# Altium PCB THREE_PHASE_METER.PcbDoc
Units mm, origin at the board's own origin, x right, y up, seen from the top; angles counter-clockwise.
Board outline 97 x 51 mm, 4 copper layers (Top Layer, Layer 2, Layer 3, Bottom Layer), stack 1.841 mm thick; 169 components, 88 nets, 392 pads, 63 vias.
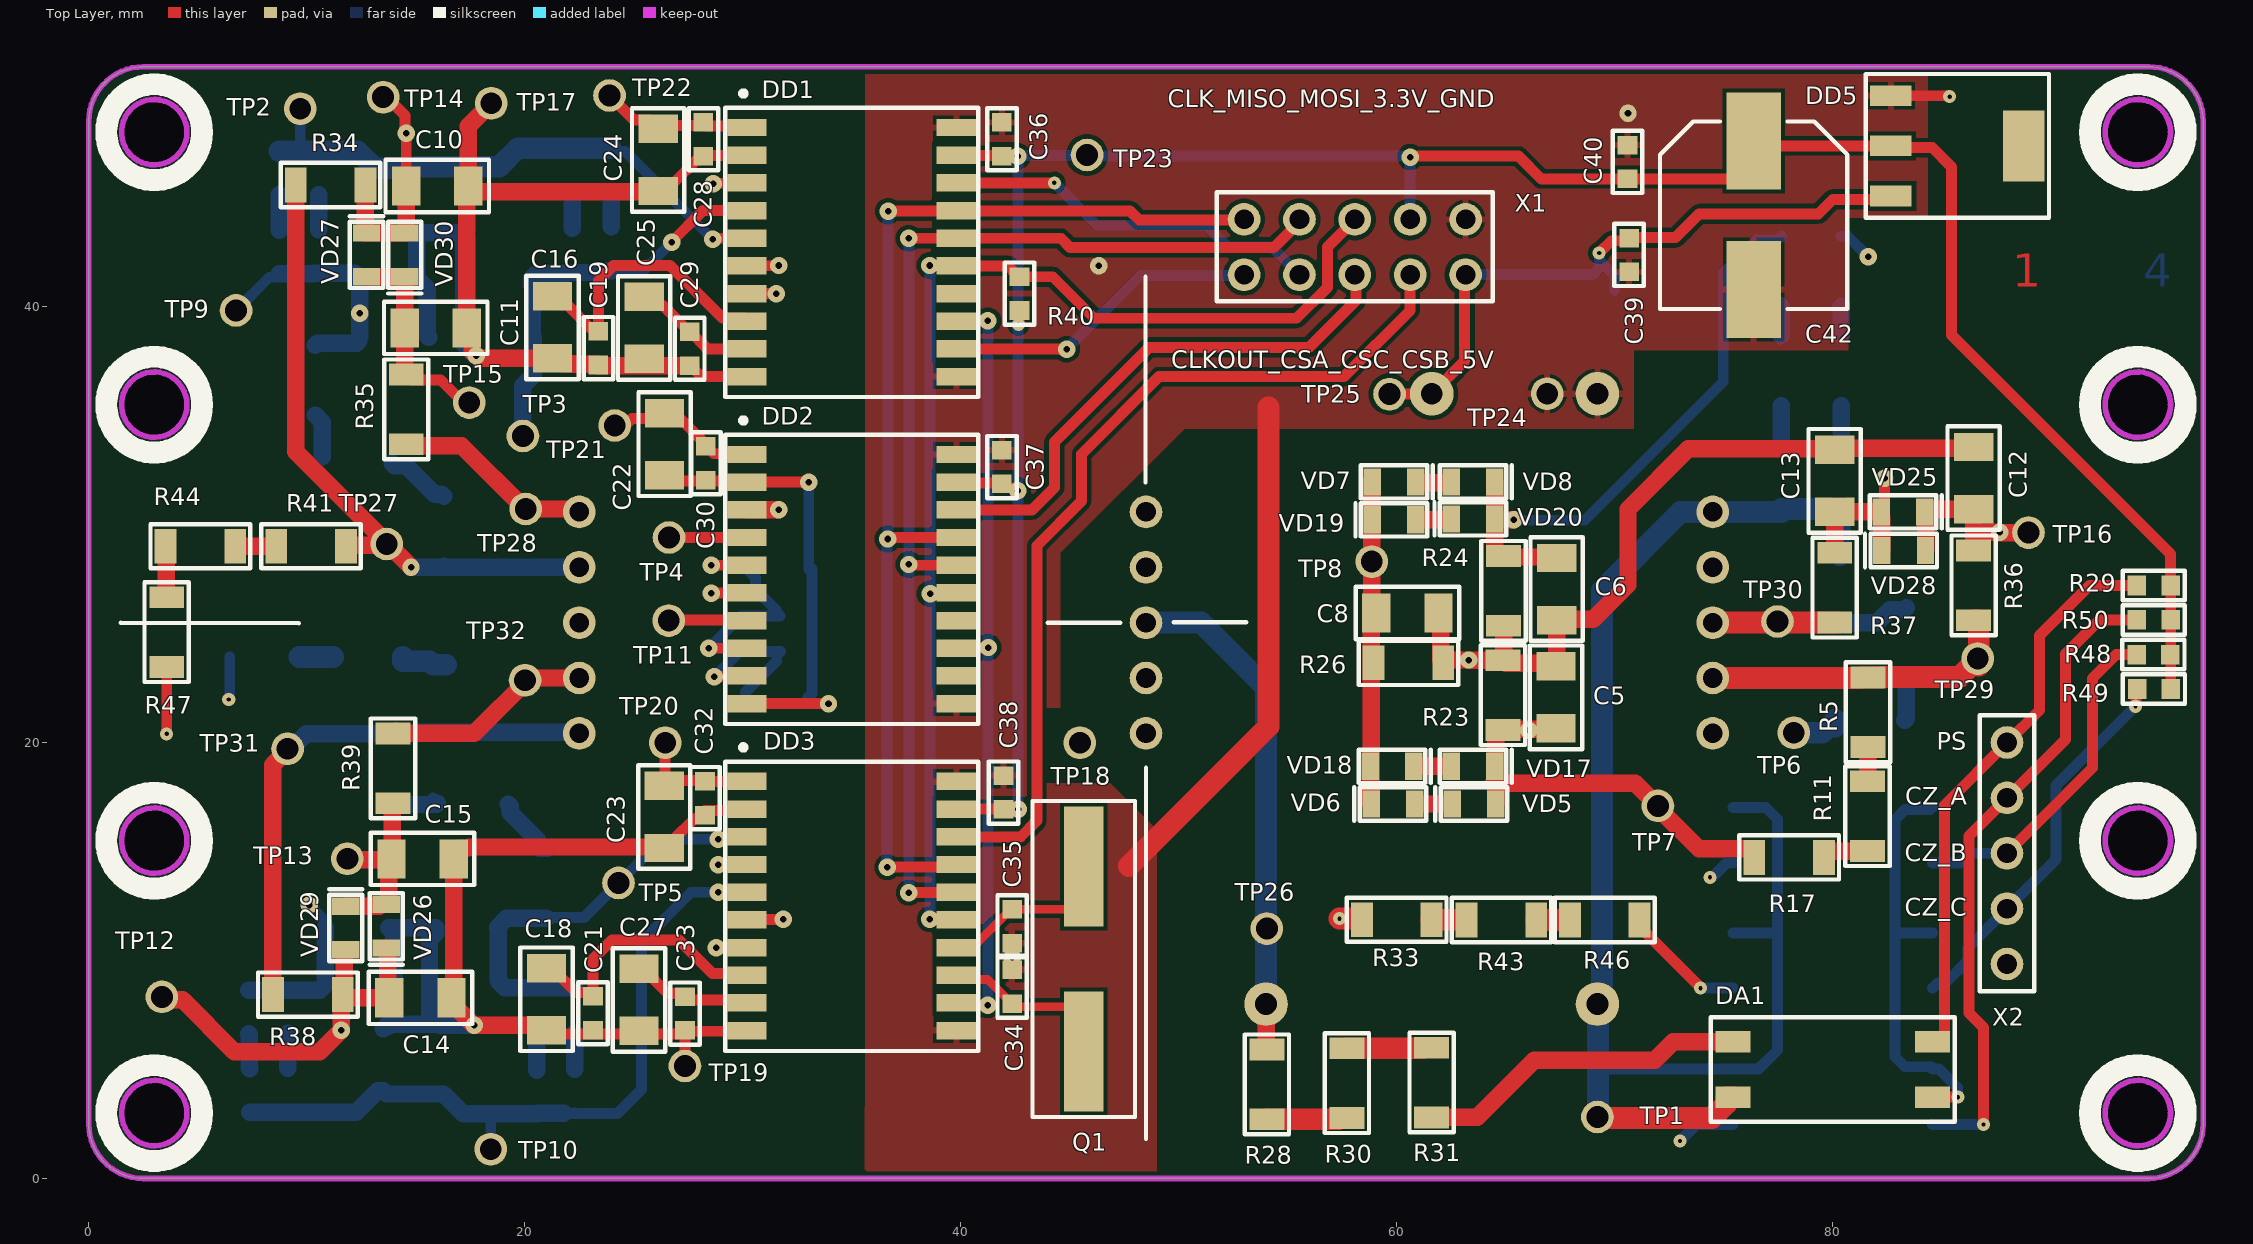
[diagram p0: Top Layer view]
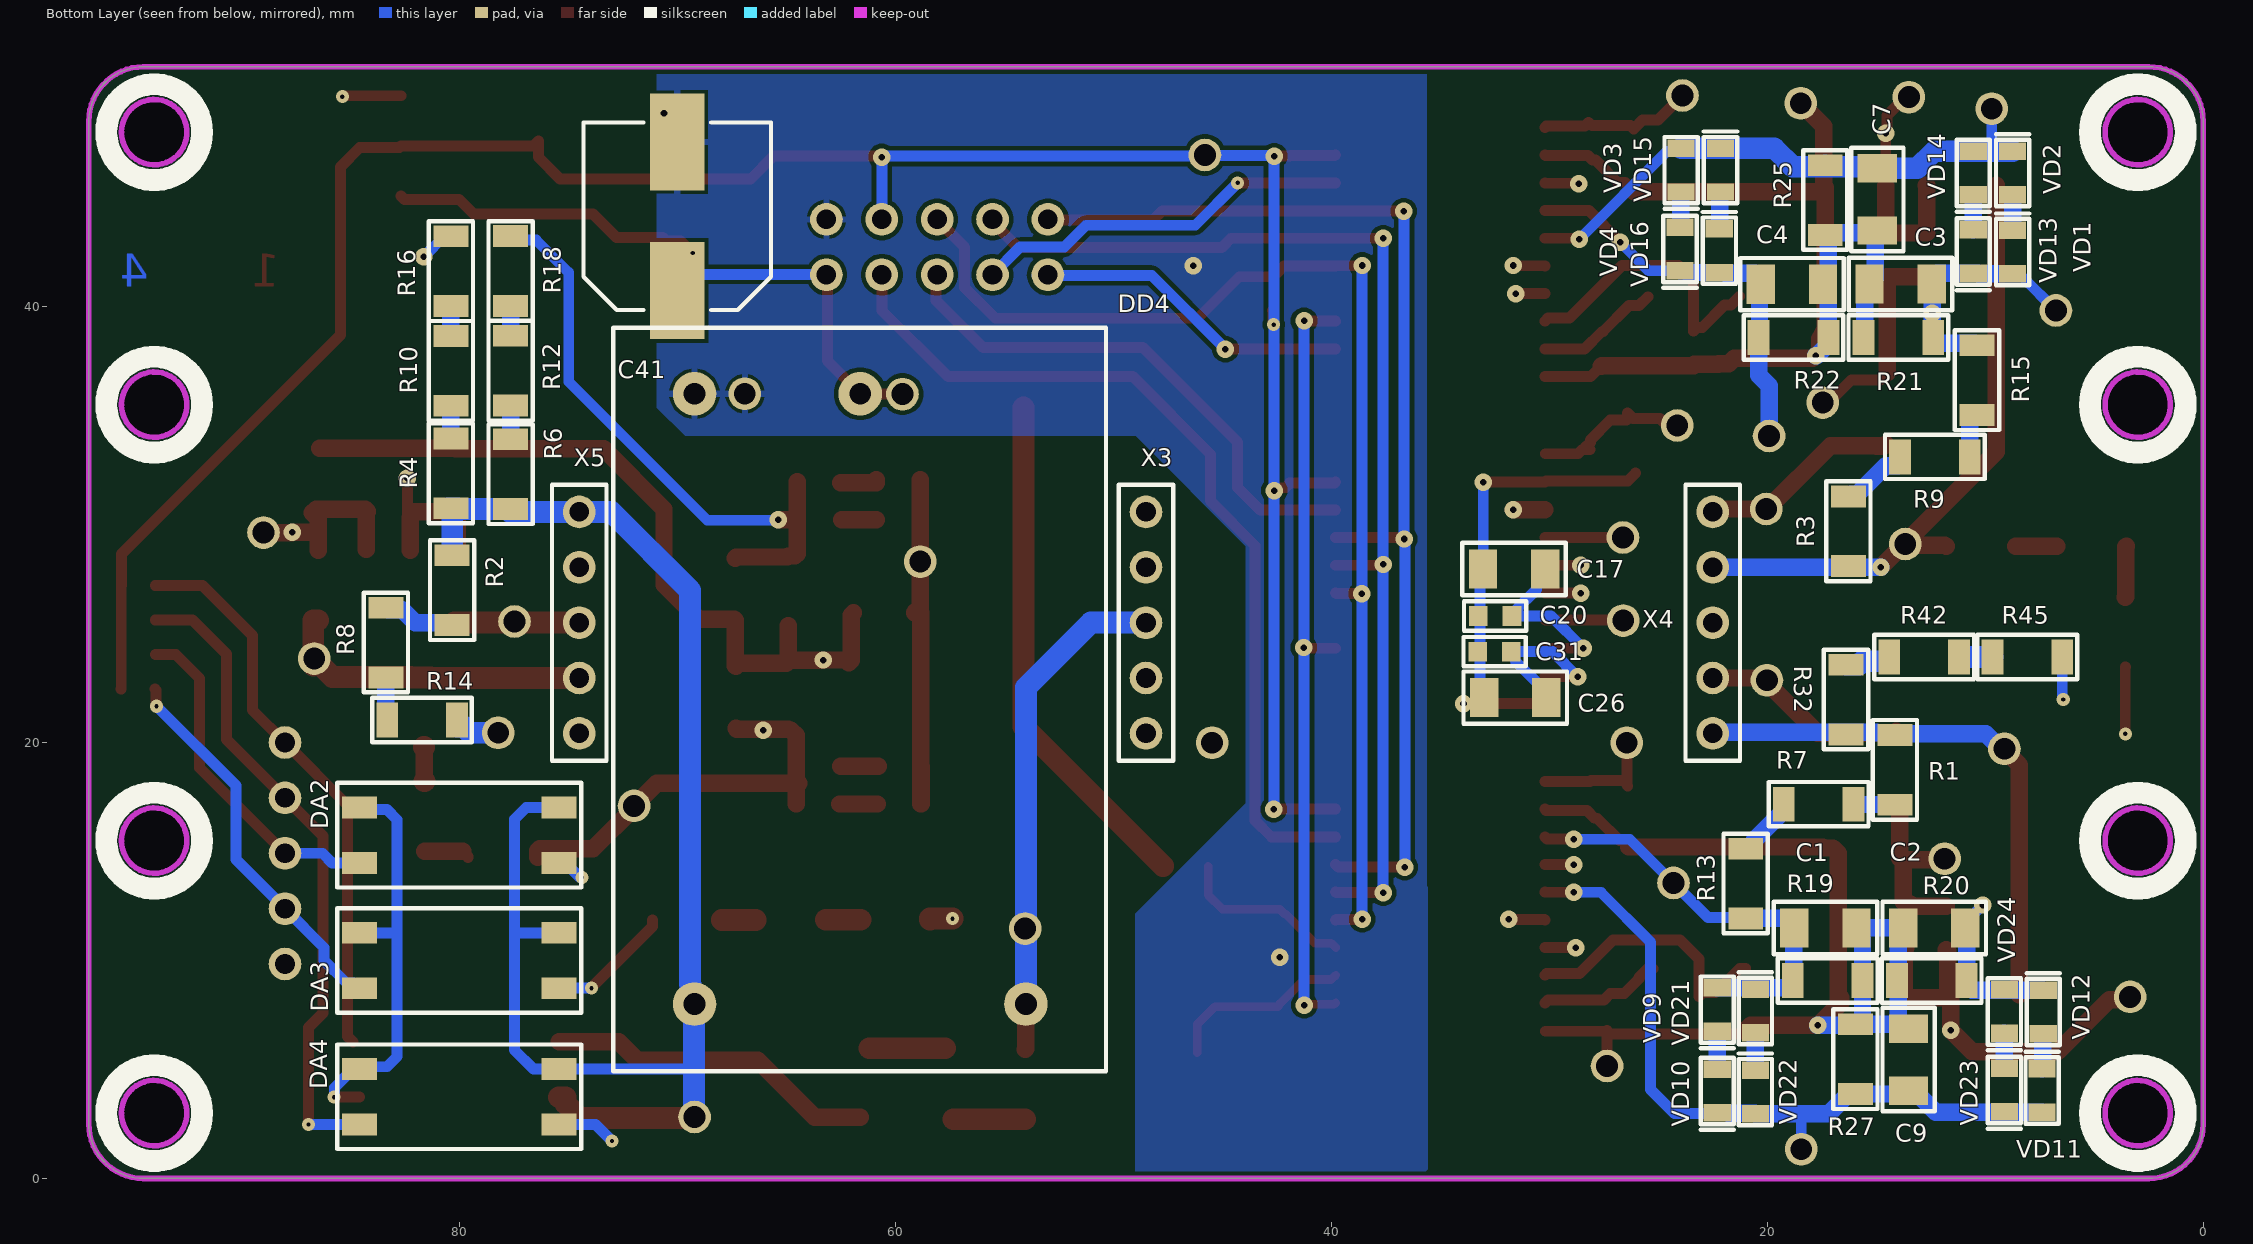
[diagram p1: Bottom Layer view, seen from below]
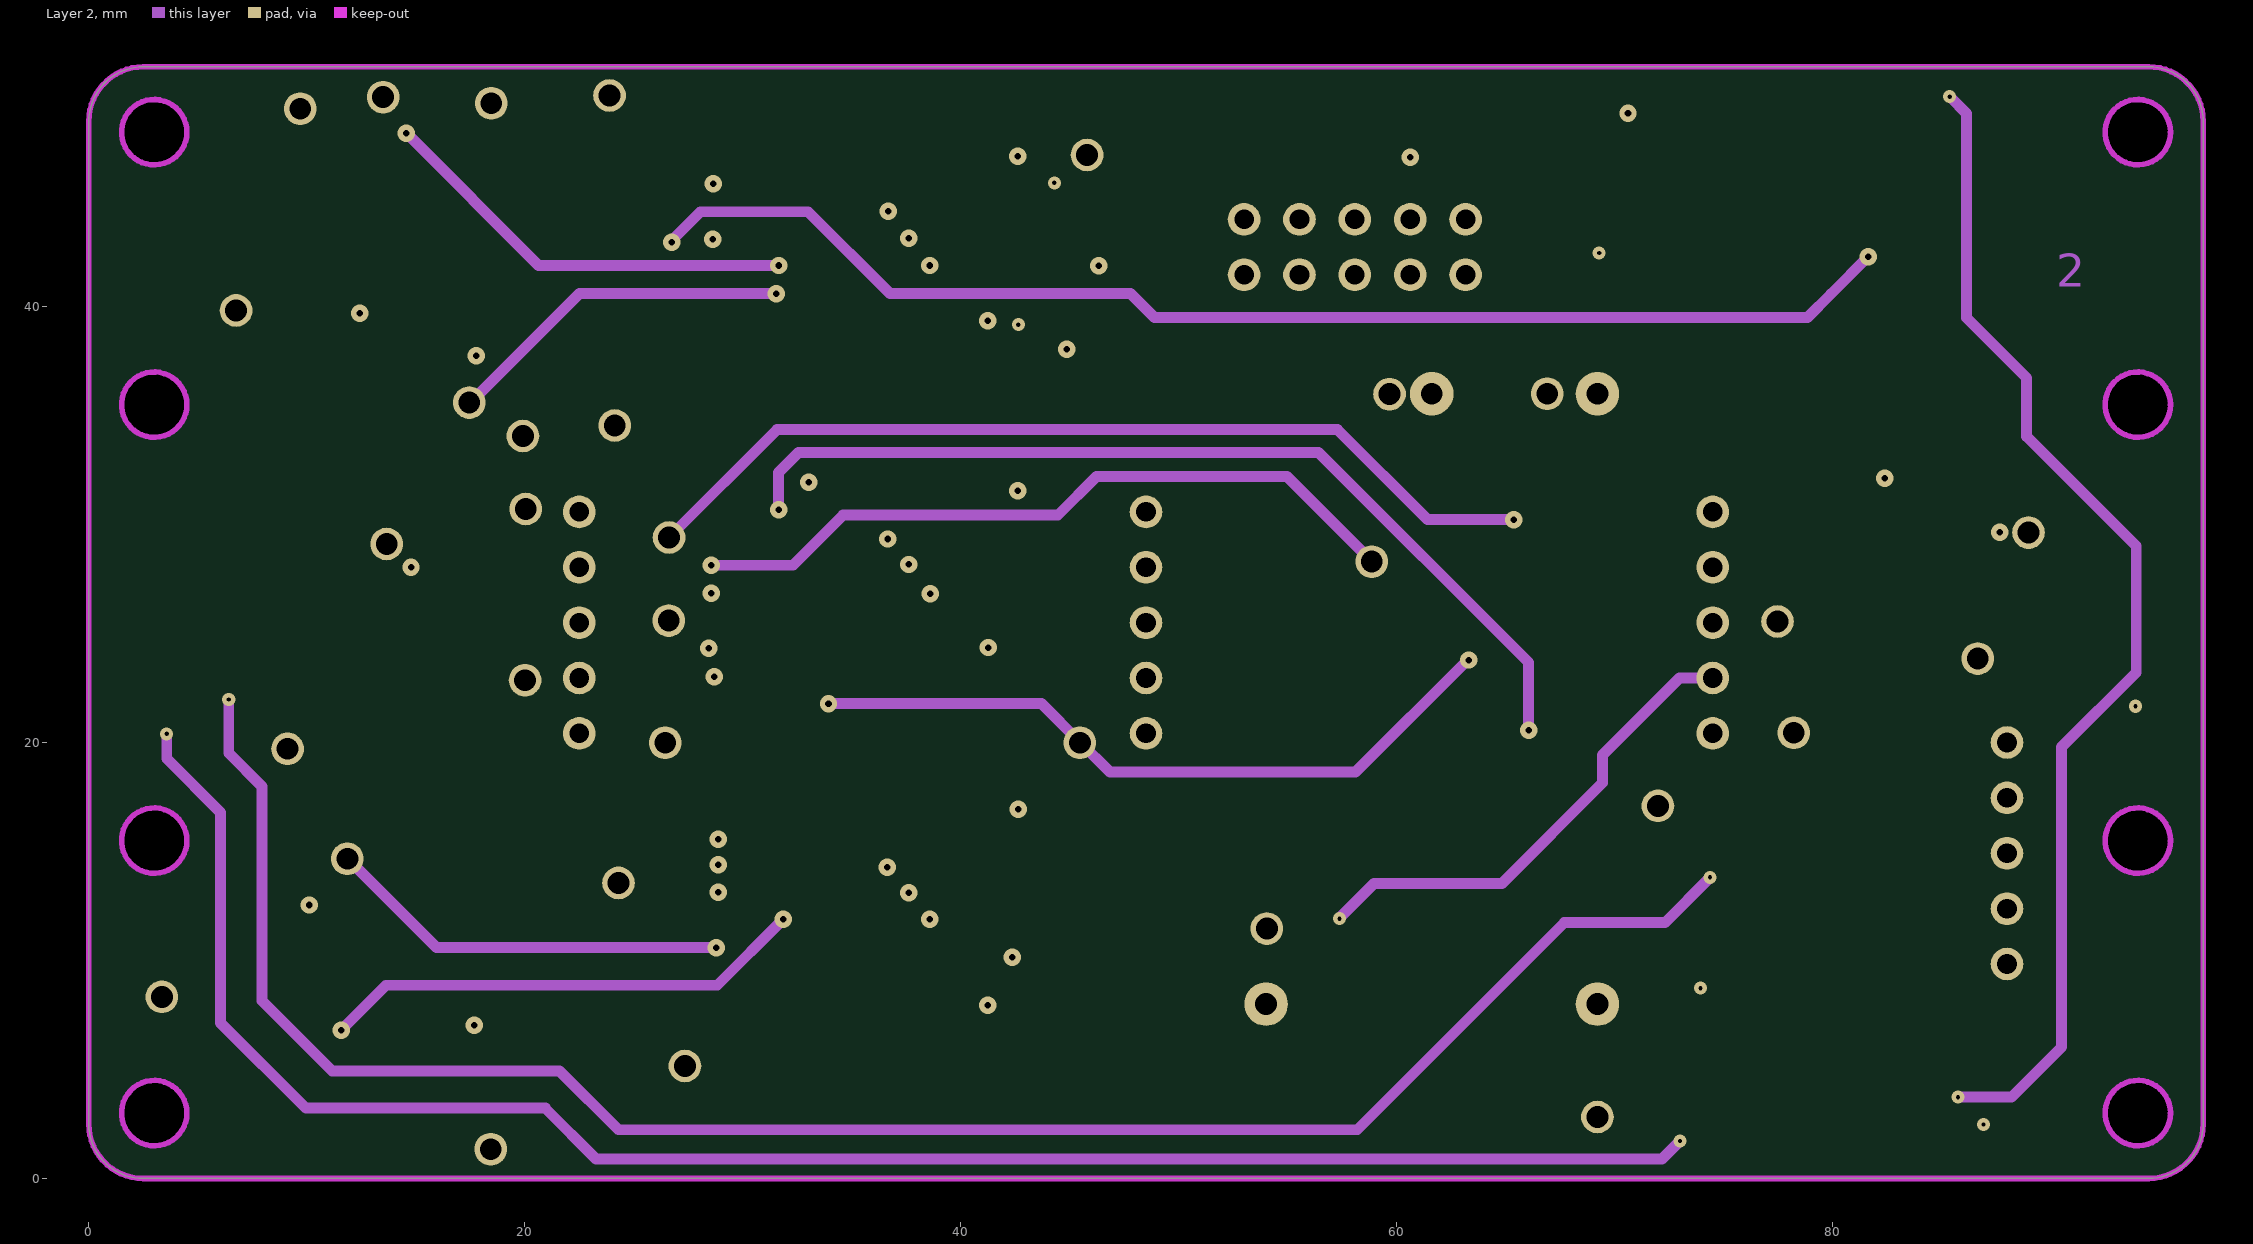
[diagram p2: Layer 2]
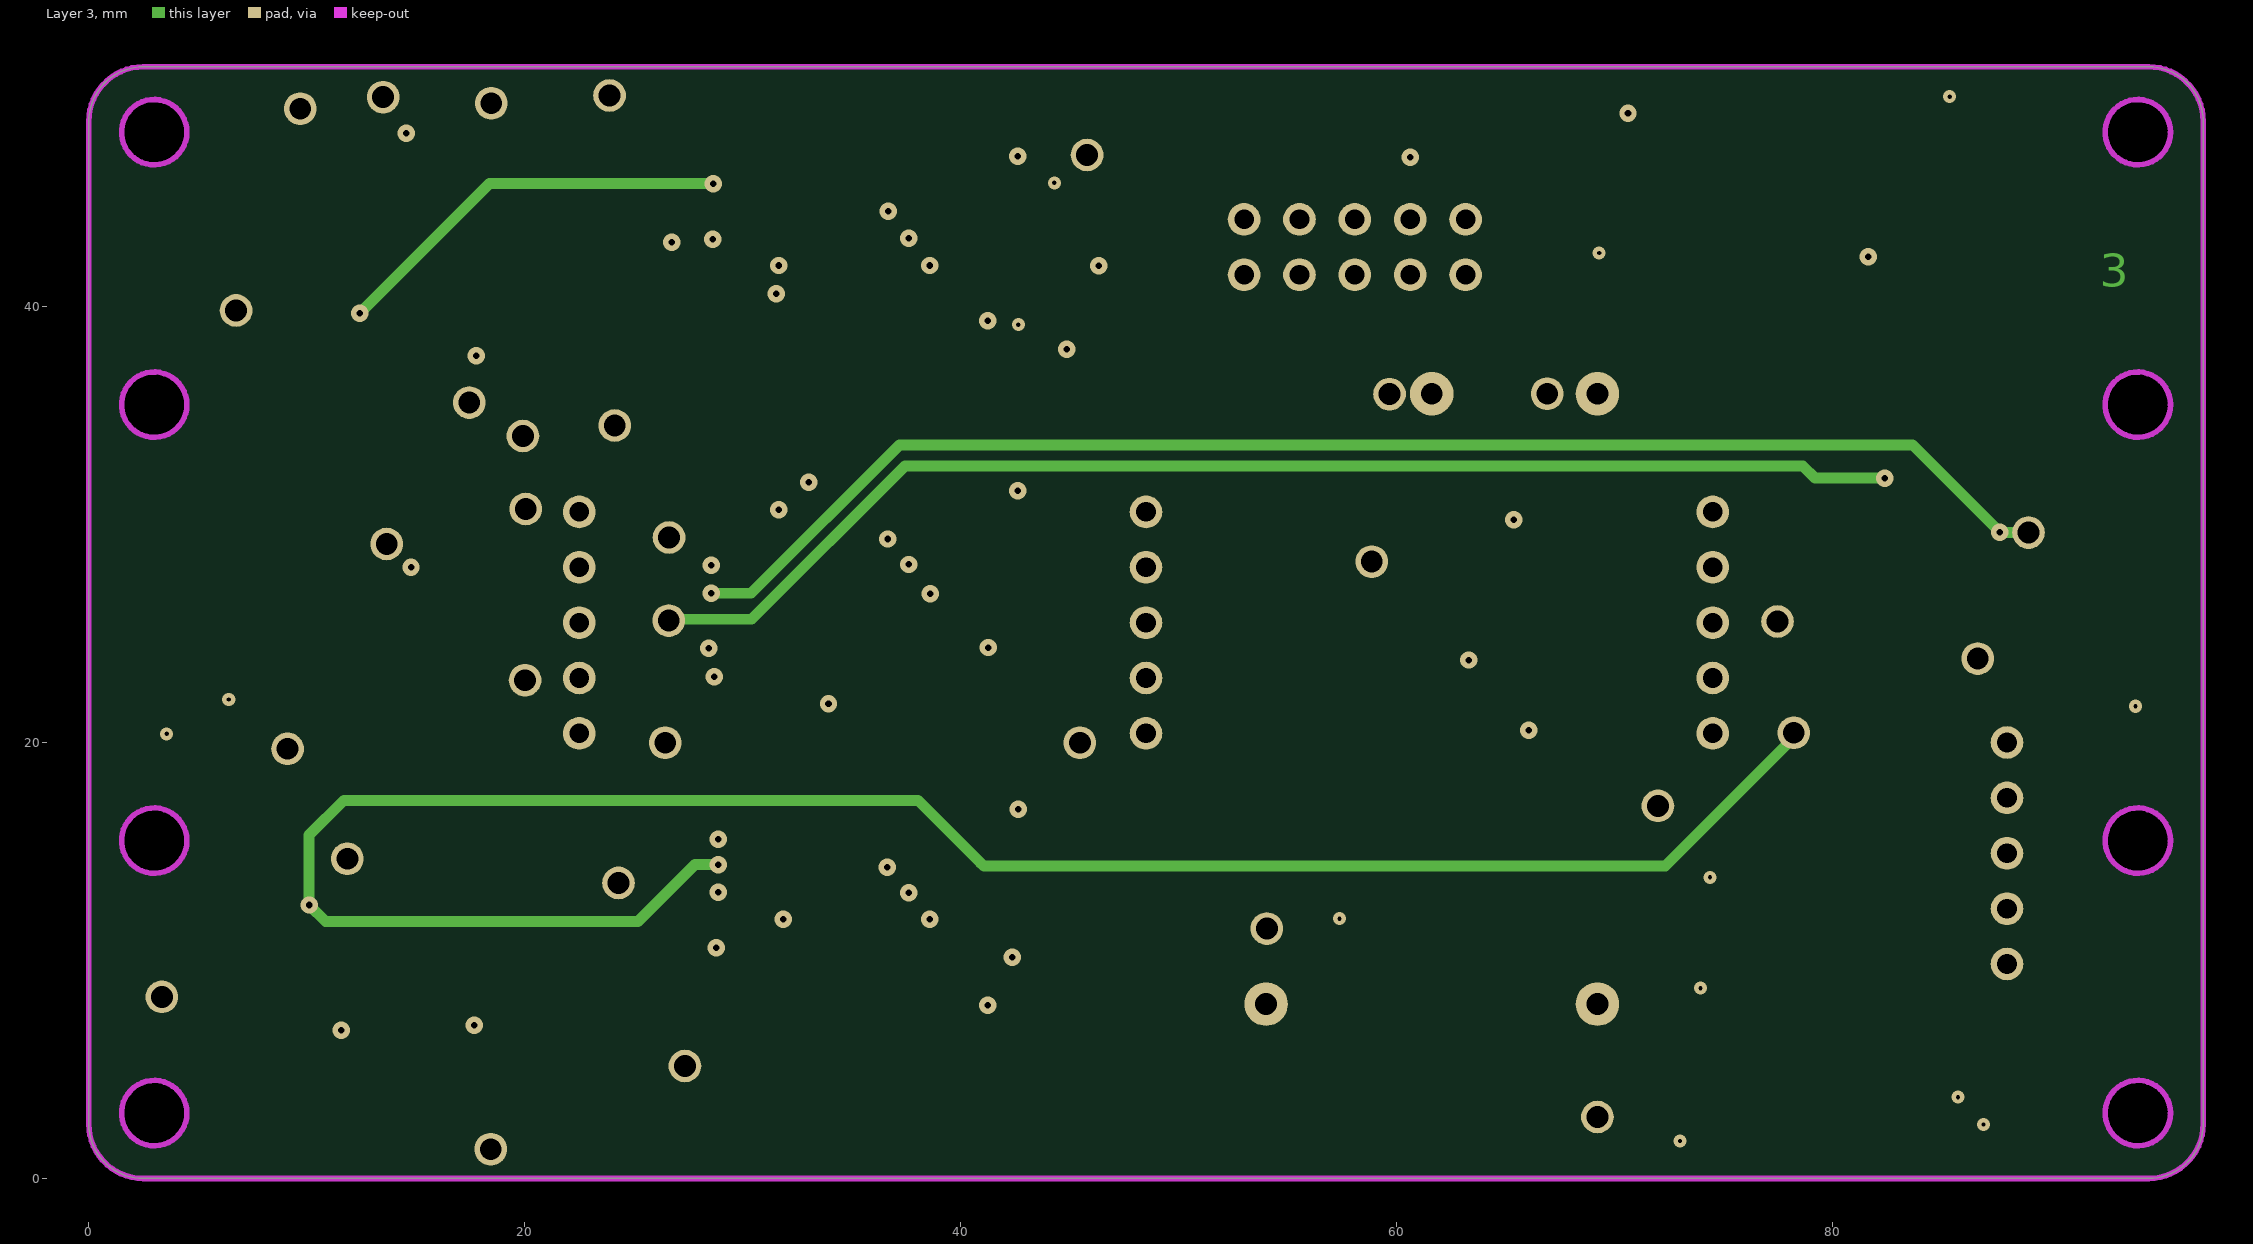
[diagram p3: Layer 3]
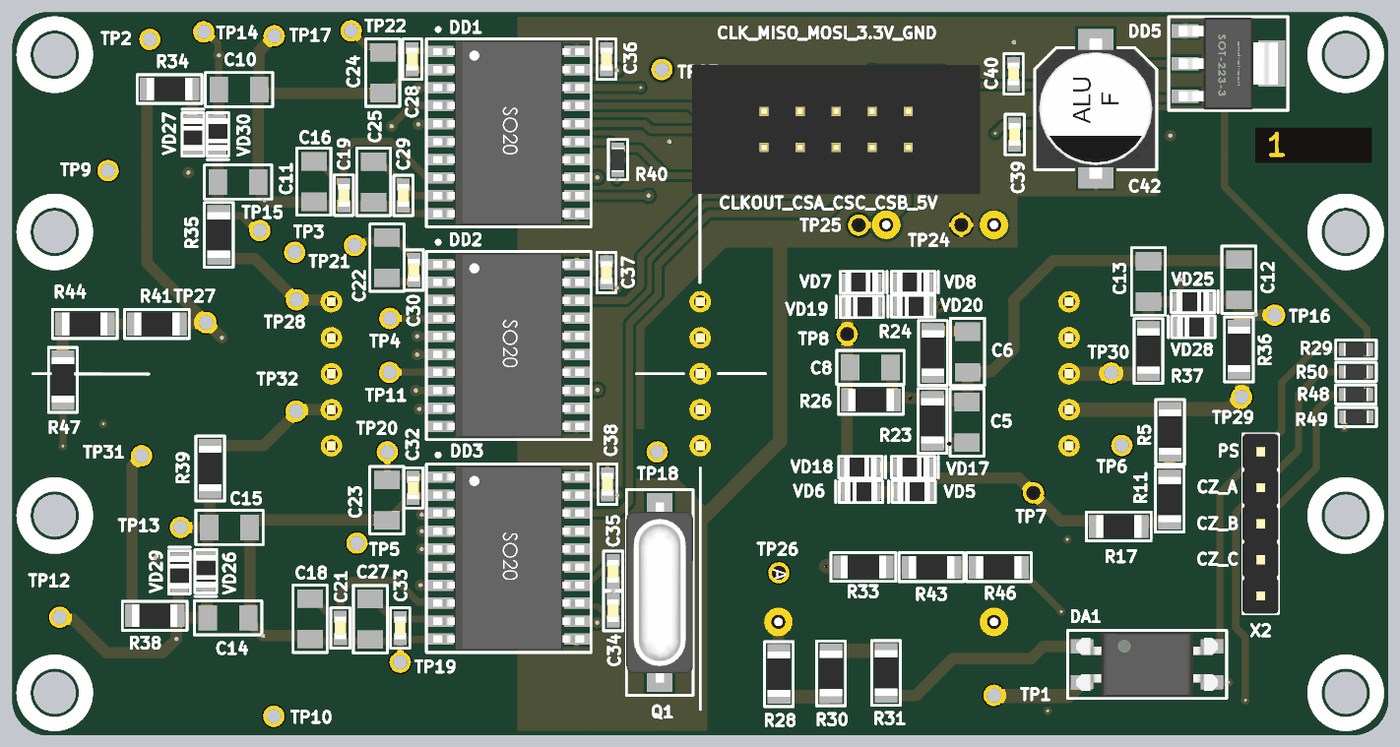
[diagram p4: 3D render of the assembled board from above, using the file's embedded part models]
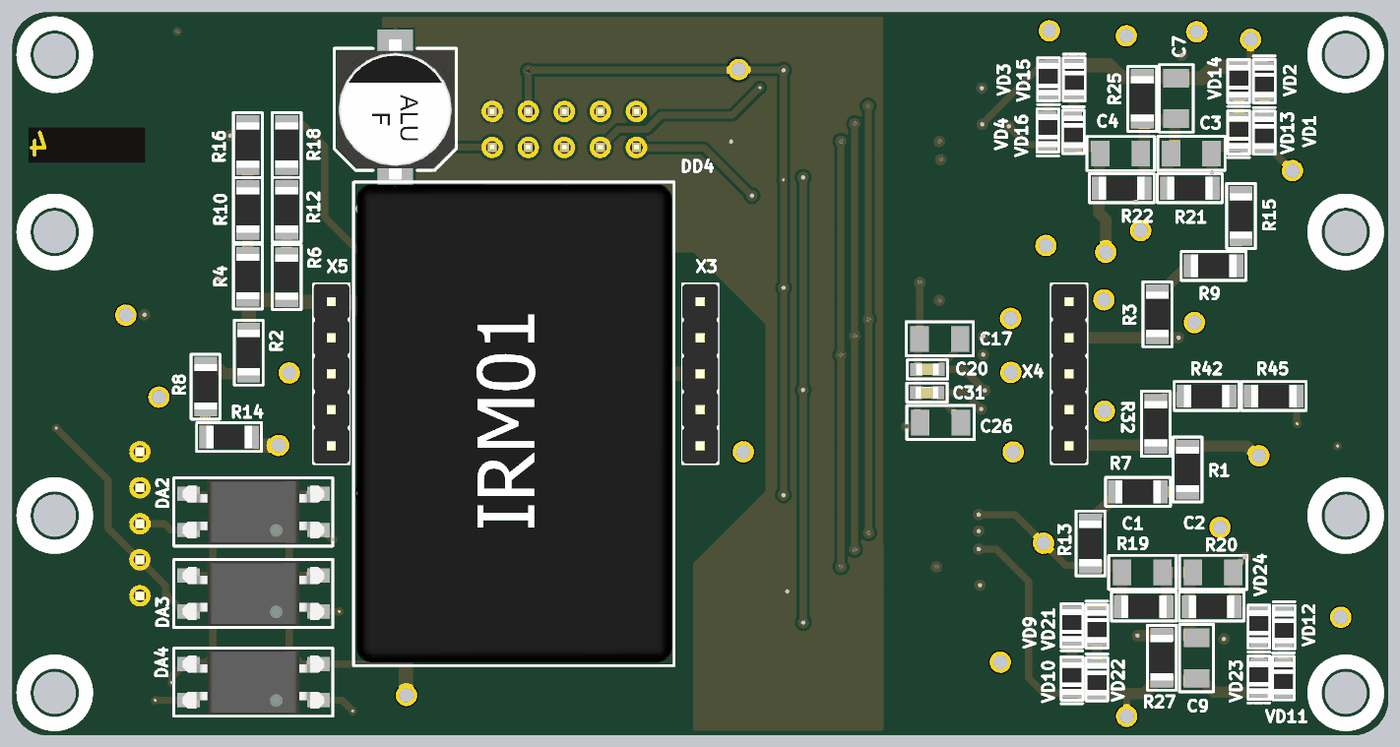
[diagram p5: 3D render of the assembled board from below, using the file's embedded part models]

## Layer stack, top to bottom
Top Solder: solder mask 0.0102, Solder Resist, Dk 3.5
Top Layer: signal copper 0.0356
Dielectric 2: prepreg 0.5, PP-006, Dk 4.1
Layer 2: signal copper 0.035
Dielectric 3: prepreg 0.7, PP-006, Dk 4.1
Layer 3: signal copper 0.035
Dielectric 1: dielectric 0.5, FR-4, Dk 4.8
Bottom Layer: signal copper 0.0356
Bottom Solder: solder mask 0.0102, Solder Resist, Dk 3.5

## Board outline
0,2.5 0,48.5 cw(c2.5,48.5) 2.5,51 94.5,51 cw(c94.5,48.5) 97,48.5 97,2.504 cw(c94.5,2.504) 94.5,0.004 94.5,0 2.515,0 2.5,0 cw(c2.5,2.5)
cut-out: 1.5,48 ccw(c3,48) 3,46.5 ccw(c3,48) 4.5,48 ccw(c3,48) 3,49.5 ccw(c3,48)
cut-out: 1.5,3 ccw(c3,3) 3,1.5 ccw(c3,3) 4.5,3 ccw(c3,3) 3,4.5 ccw(c3,3)
cut-out: 92.5,3 ccw(c94,3) 94,1.5 ccw(c94,3) 95.5,3 ccw(c94,3) 94,4.5 ccw(c94,3)
cut-out: 92.5,48 ccw(c94,48) 94,46.5 ccw(c94,48) 95.5,48 ccw(c94,48) 94,49.5 ccw(c94,48)
cut-out: 92.5,15.5 ccw(c94,15.5) 94,14 ccw(c94,15.5) 95.5,15.5 ccw(c94,15.5) 94,17 ccw(c94,15.5)
cut-out: 92.5,35.5 ccw(c94,35.5) 94,34 ccw(c94,35.5) 95.5,35.5 ccw(c94,35.5) 94,37 ccw(c94,35.5)
cut-out: 1.5,15.5 ccw(c3,15.5) 3,14 ccw(c3,15.5) 4.5,15.5 ccw(c3,15.5) 3,17 ccw(c3,15.5)
cut-out: 1.5,35.5 ccw(c3,35.5) 3,34 ccw(c3,35.5) 4.5,35.5 ccw(c3,35.5) 3,37 ccw(c3,35.5)

## Design rules (kind name [scope] priority, off if disabled: settings)
Clearance [All] p1: gap=0.2 ignorepadtopadclearanceinfootprint=FALSE
ComponentClearance [All] p1: gap=0.254 collisioncheckmode=3 verticalgap=-1000 showdistances=FALSE
DiffPairsRouting [All] p1: maxlimit=0.254 minlimit=0.254 mostfreqgap=0.254 substack1={4B50B899-47C3-418E-9050-B6DC38691620} toplayer_{4b50b899-47c3-418e-9050-b6dc38691620}_minwidth=0.381 toplayer_{4b50b899-47c3-418e-9050-b6dc38691620}_maxwidth=0.381 toplayer_{4b50b899-47c3-418e-9050-b6dc38691620}_prefwidth=0.381 midlayer1_{4b50b899-47c3-418e-9050-b6dc38691620}_minwidth=0.381 midlayer1_{4b50b899-47c3-418e-9050-b6dc38691620}_maxwidth=0.381 midlayer1_{4b50b899-47c3-418e-9050-b6dc38691620}_prefwidth=0.381 midlayer2_{4b50b899-47c3-418e-9050-b6dc38691620}_minwidth=0.381 midlayer2_{4b50b899-47c3-418e-9050-b6dc38691620}_maxwidth=0.381 midlayer2_{4b50b899-47c3-418e-9050-b6dc38691620}_prefwidth=0.381 bottomlayer_{4b50b899-47c3-418e-9050-b6dc38691620}_minwidth=0.381 bottomlayer_{4b50b899-47c3-418e-9050-b6dc38691620}_maxwidth=0.381 bottomlayer_{4b50b899-47c3-418e-9050-b6dc38691620}_prefwidth=0.381 substack2={0B3DB408-A969-412D-8C07-BA8AE97219D9} toplayer_{0b3db408-a969-412d-8c07-ba8ae97219d9}_minwidth=0.381 toplayer_{0b3db408-a969-412d-8c07-ba8ae97219d9}_maxwidth=0.381 toplayer_{0b3db408-a969-412d-8c07-ba8ae97219d9}_prefwidth=0.381 midlayer1_{0b3db408-a969-412d-8c07-ba8ae97219d9}_minwidth=0.381 midlayer1_{0b3db408-a969-412d-8c07-ba8ae97219d9}_maxwidth=0.381 midlayer1_{0b3db408-a969-412d-8c07-ba8ae97219d9}_prefwidth=0.381 midlayer2_{0b3db408-a969-412d-8c07-ba8ae97219d9}_minwidth=0.381 midlayer2_{0b3db408-a969-412d-8c07-ba8ae97219d9}_maxwidth=0.381 midlayer2_{0b3db408-a969-412d-8c07-ba8ae97219d9}_prefwidth=0.381 bottomlayer_{0b3db408-a969-412d-8c07-ba8ae97219d9}_minwidth=0.381 bottomlayer_{0b3db408-a969-412d-8c07-ba8ae97219d9}_maxwidth=0.381 bottomlayer_{0b3db408-a969-412d-8c07-ba8ae97219d9}_prefwidth=0.381 substack3={378827E6-B38F-4565-9D2F-710D8D441C30} toplayer_{378827e6-b38f-4565-9d2f-710d8d441c30}_minwidth=0.381 toplayer_{378827e6-b38f-4565-9d2f-710d8d441c30}_maxwidth=0.381 toplayer_{378827e6-b38f-4565-9d2f-710d8d441c30}_prefwidth=0.381 midlayer1_{378827e6-b38f-4565-9d2f-710d8d441c30}_minwidth=0.381 midlayer1_{378827e6-b38f-4565-9d2f-710d8d441c30}_maxwidth=0.381 midlayer1_{378827e6-b38f-4565-9d2f-710d8d441c30}_prefwidth=0.381 midlayer2_{378827e6-b38f-4565-9d2f-710d8d441c30}_minwidth=0.381 midlayer2_{378827e6-b38f-4565-9d2f-710d8d441c30}_maxwidth=0.381 midlayer2_{378827e6-b38f-4565-9d2f-710d8d441c30}_prefwidth=0.381 bottomlayer_{378827e6-b38f-4565-9d2f-710d8d441c30}_minwidth=0.381 bottomlayer_{378827e6-b38f-4565-9d2f-710d8d441c30}_maxwidth=0.381 bottomlayer_{378827e6-b38f-4565-9d2f-710d8d441c30}_prefwidth=0.381 substack4={A23D90DD-733B-49C5-8102-56B3D284E3A0} toplayer_{a23d90dd-733b-49c5-8102-56b3d284e3a0}_minwidth=0.381 toplayer_{a23d90dd-733b-49c5-8102-56b3d284e3a0}_maxwidth=0.381 toplayer_{a23d90dd-733b-49c5-8102-56b3d284e3a0}_prefwidth=0.381 midlayer1_{a23d90dd-733b-49c5-8102-56b3d284e3a0}_minwidth=0.381 midlayer1_{a23d90dd-733b-49c5-8102-56b3d284e3a0}_maxwidth=0.381 midlayer1_{a23d90dd-733b-49c5-8102-56b3d284e3a0}_prefwidth=0.381 midlayer2_{a23d90dd-733b-49c5-8102-56b3d284e3a0}_minwidth=0.381 midlayer2_{a23d90dd-733b-49c5-8102-56b3d284e3a0}_maxwidth=0.381 midlayer2_{a23d90dd-733b-49c5-8102-56b3d284e3a0}_prefwidth=0.381 bottomlayer_{a23d90dd-733b-49c5-8102-56b3d284e3a0}_minwidth=0.381 bottomlayer_{a23d90dd-733b-49c5-8102-56b3d284e3a0}_maxwidth=0.381 bottomlayer_{a23d90dd-733b-49c5-8102-56b3d284e3a0}_prefwidth=0.381 toplayer_minwidth=0.381 toplayer_maxwidth=0.381 toplayer_prefwidth=0.381 midlayer1_minwidth=0.381 midlayer1_maxwidth=0.381 midlayer1_prefwidth=0.381 midlayer2_minwidth=0.381 midlayer2_maxwidth=0.381 midlayer2_prefwidth=0.381 bottomlayer_minwidth=0.381 bottomlayer_maxwidth=0.381 bottomlayer_prefwidth=0.381 substack5={2AFA0E03-A734-4C26-A0DC-ACBC6FAC5E6E} toplayer_{2afa0e03-a734-4c26-a0dc-acbc6fac5e6e}_minwidth=0.381 toplayer_{2afa0e03-a734-4c26-a0dc-acbc6fac5e6e}_maxwidth=0.381 toplayer_{2afa0e03-a734-4c26-a0dc-acbc6fac5e6e}_prefwidth=0.381 midlayer1_{2afa0e03-a734-4c26-a0dc-acbc6fac5e6e}_minwidth=0.381 midlayer1_{2afa0e03-a734-4c26-a0dc-acbc6fac5e6e}_maxwidth=0.381 midlayer1_{2afa0e03-a734-4c26-a0dc-acbc6fac5e6e}_prefwidth=0.381 midlayer2_{2afa0e03-a734-4c26-a0dc-acbc6fac5e6e}_minwidth=0.381 midlayer2_{2afa0e03-a734-4c26-a0dc-acbc6fac5e6e}_maxwidth=0.381 midlayer2_{2afa0e03-a734-4c26-a0dc-acbc6fac5e6e}_prefwidth=0.381 bottomlayer_{2afa0e03-a734-4c26-a0dc-acbc6fac5e6e}_minwidth=0.381 bottomlayer_{2afa0e03-a734-4c26-a0dc-acbc6fac5e6e}_maxwidth=0.381 bottomlayer_{2afa0e03-a734-4c26-a0dc-acbc6fac5e6e}_prefwidth=0.381 substack6={1E65D4A7-266F-4925-B814-5E9C4A66F8EE} toplayer_{1e65d4a7-266f-4925-b814-5e9c4a66f8ee}_minwidth=0.381 toplayer_{1e65d4a7-266f-4925-b814-5e9c4a66f8ee}_maxwidth=0.381 toplayer_{1e65d4a7-266f-4925-b814-5e9c4a66f8ee}_prefwidth=0.381 midlayer1_{1e65d4a7-266f-4925-b814-5e9c4a66f8ee}_minwidth=0.381 midlayer1_{1e65d4a7-266f-4925-b814-5e9c4a66f8ee}_maxwidth=0.381 midlayer1_{1e65d4a7-266f-4925-b814-5e9c4a66f8ee}_prefwidth=0.381 midlayer2_{1e65d4a7-266f-4925-b814-5e9c4a66f8ee}_minwidth=0.381 midlayer2_{1e65d4a7-266f-4925-b814-5e9c4a66f8ee}_maxwidth=0.381 midlayer2_{1e65d4a7-266f-4925-b814-5e9c4a66f8ee}_prefwidth=0.381 bottomlayer_{1e65d4a7-266f-4925-b814-5e9c4a66f8ee}_minwidth=0.381 bottomlayer_{1e65d4a7-266f-4925-b814-5e9c4a66f8ee}_maxwidth=0.381 bottomlayer_{1e65d4a7-266f-4925-b814-5e9c4a66f8ee}_prefwidth=0.381 substack7={93C5D03E-862D-45F8-9871-970EEA9B3F11} toplayer_{93c5d03e-862d-45f8-9871-970eea9b3f11}_minwidth=0.381 toplayer_{93c5d03e-862d-45f8-9871-970eea9b3f11}_maxwidth=0.381 toplayer_{93c5d03e-862d-45f8-9871-970eea9b3f11}_prefwidth=0.381 midlayer1_{93c5d03e-862d-45f8-9871-970eea9b3f11}_minwidth=0.381 midlayer1_{93c5d03e-862d-45f8-9871-970eea9b3f11}_maxwidth=0.381 midlayer1_{93c5d03e-862d-45f8-9871-970eea9b3f11}_prefwidth=0.381 midlayer2_{93c5d03e-862d-45f8-9871-970eea9b3f11}_minwidth=0.381 midlayer2_{93c5d03e-862d-45f8-9871-970eea9b3f11}_maxwidth=0.381 midlayer2_{93c5d03e-862d-45f8-9871-970eea9b3f11}_prefwidth=0.381 bottomlayer_{93c5d03e-862d-45f8-9871-970eea9b3f11}_minwidth=0.381 bottomlayer_{93c5d03e-862d-45f8-9871-970eea9b3f11}_maxwidth=0.381 bottomlayer_{93c5d03e-862d-45f8-9871-970eea9b3f11}_prefwidth=0.381 maxuncoupledlength=12.7
Height [All] p1: minheight=-1000 maxheight=100 prefheight=12.7
HoleSize [All] p1: absolutevalues=TRUE maxlimit=6 minlimit=0.01 maxpercent=80.000 minpercent=20.000
HoleToHoleClearance [All] p1: gap=0.1 allowstackedmicrovias=TRUE
MinimumSolderMaskSliver [All] p1: minsoldermaskwidth=0.1
PlaneConnect [All] p1: pad.planeconnectstyle=Relief pad.reliefexpansion=0.5 pad.reliefentries=4 pad.reliefconductorwidth=0.5 pad.reliefairgap=0.15 via.planeconnectstyle=Direct via.reliefexpansion=0.5 via.reliefentries=4 via.reliefconductorwidth=0.5 via.reliefairgap=0.15
PolygonConnect VQFN20 [HasFootprint('VQFN20')] p1: connectstyle=Direct reliefconductorwidth=0.254 reliefentries=4 polygonreliefangle="90 Angle" airgapwidth=0.254
PolygonConnect [All] p2: thpad.connectstyle=Relief thpad.reliefconductorwidth=0.3 thpad.reliefentries=4 thpad.polygonreliefangle="90 Angle" thpad.airgapwidth=0.15 smdpad.connectstyle=Relief smdpad.reliefconductorwidth=0.3 smdpad.reliefentries=4 smdpad.polygonreliefangle="90 Angle" smdpad.airgapwidth=0.15 via.connectstyle=Direct via.reliefconductorwidth=0.3 via.reliefentries=4 via.polygonreliefangle="90 Angle" via.airgapwidth=0.15
RoutingVias [All] p1: holewidth=0.1 width=0.1 viastyle="Through Hole" minholewidth=0 minwidth=0.3 maxholewidth=2 maxwidth=4
ShortCircuit [All] p1: allowed=TRUE
SilkToSolderMaskClearance [IsPad] p1: minsilkscreentomaskgap=0.1 clearancetoexposedcopper=TRUE
SolderMaskExpansion SolderMaskExpansion_Via [IsVia] p1: expansion=0.102 istentingtop=TRUE
SolderMaskExpansion [All] p2: expansion=0.01 istentingtop=FALSE
UnRoutedNet [All] p1: checkbadconnections=TRUE
Width [All] p1: maxlimit=5 minlimit=0.2 preferedwidth=0.3 substack1={4B50B899-47C3-418E-9050-B6DC38691620} substack2={0B3DB408-A969-412D-8C07-BA8AE97219D9} substack3={378827E6-B38F-4565-9D2F-710D8D441C30} substack4={A23D90DD-733B-49C5-8102-56B3D284E3A0} substack5={2AFA0E03-A734-4C26-A0DC-ACBC6FAC5E6E} substack6={1E65D4A7-266F-4925-B814-5E9C4A66F8EE} substack7={93C5D03E-862D-45F8-9871-970EEA9B3F11}
20 further rules are at their usual default settings.

## Components (designator, comment, footprint, x,y, rotation, side; value= is the part's Value field where it differs from the comment)
C1 "33nF" CAP-1206 17.333,11.495 r0 bottom
C2 "33nF" CAP-1206 12.341,11.495 r180 bottom
C3 "33nF" CAP-1206 13.884,41.039 r180 bottom
C4 "33nF" CAP-1206 18.871,41.027 r0 bottom
C5 "33nF" CAP-1206 67.309,22.074 r270 top
C6 "33nF" CAP-1206 67.341,27.037 r90 top
C7 "33nF" CAP-1206 14.951,44.916 r90 bottom
C8 "33nF" CAP-1206 60.493,25.944 r180 top
C9 "33nF" CAP-1206 13.516,5.452 r270 bottom
C10 "33nF" CAP-1206 15.988,45.534 r180 top
C11 "33nF" CAP-1206 15.916,39.021 r180 top
C12 "33nF" CAP-1206 86.47,32.134 r270 top
C13 "33nF" CAP-1206 80.095,32.007 r270 top
C14 "33nF" CAP-1206 15.211,8.287 r180 top
C15 "33nF" CAP-1206 15.313,14.663 r180 top
C16 "4.7uF" CAP-1206 21.269,39.047 r90 top
C17 "4.7uF" CAP-1206 31.613,27.961 r180 bottom
C18 "4.7uF" CAP-1206 20.999,8.221 r90 top
C19 "100nF" CAP-0603 23.377,38.094 r90 top
C20 "100nF" CAP-0603 32.484,25.806 r180 bottom
C21 "100nF" CAP-0603 23.133,7.576 r90 top
C22 "10uF" CAP-1206 26.416,33.688 r90 top
C23 "10uF" CAP-1206 26.4,16.586 r90 top
C24 "10uF" CAP-1206 26.122,46.728 r90 top
C25 "4.7uF" CAP-1206 25.477,39.024 r90 top
C26 "4.7uF" CAP-1206 31.559,22.06 r180 bottom
C27 "4.7uF" CAP-1206 25.241,8.195 r90 top
C28 "100nF" CAP-0603 28.194,47.678 r90 top
C29 "100nF" CAP-0603 27.568,38.069 r90 top
C30 "100nF" CAP-0603 28.309,32.815 r90 top
C31 "100nF" CAP-0603 32.511,24.169 r180 bottom
C32 "100nF" CAP-0603 28.267,17.45 r90 top
C33 "100nF" CAP-0603 27.349,7.566 r90 top
C34 "22pF" CAP-0603 42.36,8.801 r270 top
C35 "22pF" CAP-0603 42.36,11.571 r90 top
C36 "100nF" CAP-0603 41.891,47.678 r90 top
C37 "100nF" CAP-0603 41.891,32.639 r90 top
C38 "100nF" CAP-0603 41.961,17.704 r90 top
C39 "100nF" CAP-0603 70.663,42.367 r90 top
C40 "100nF" CAP-0603 70.587,46.634 r270 top
C41 "=Value" CAPAE9185X108M 70.002,44.142 r90 bottom
C42 "=Value" CAPAE9185X108M 76.378,44.19 r270 top
DA1 "PC817" 4-SMD 80,5 r0 top locked
DA2 "PC817" 4-SMD 80,15.75 r0 bottom locked
DA3 "PC817" 4-SMD 80,10 r0 bottom locked
DA4 "PC817" 4-SMD 80,3.75 r0 bottom locked
DD1 "ADE7913" SOIC20 35,42.5 r270 top locked
DD2 "ADE7913" SOIC20 35,27.5 r270 top locked
DD3 "ADE7913" SOIC20 35,12.5 r270 top locked
DD4 "IRM-01" IRM-01 61.61,22 r90 bottom locked
DD5 "AMS1117" SOT-223-3 85.725,47.371 r270 top
Q1 "OSC-2-PIN" OSC-QSMD12.3x4.5x4.2 45.644,10.071 r90 top locked
R1 "330K" RES-1206 14.148,18.745 r90 bottom
R2 "330K" RES-1206 80.33,26.99 r90 bottom
R3 "330K" RES-1206 16.277,29.693 r270 bottom locked
R4 "330K" RES-1206 80.391,32.352 r270 bottom
R5 "330K" RES-1206 81.621,21.389 r90 top
R6 "330K" RES-1206 77.648,32.309 r270 bottom
R7 "330K" RES-1206 17.643,17.17 r180 bottom
R8 "330K" RES-1206 83.372,24.587 r90 bottom
R9 "330K" RES-1206 12.31,33.103 r0 bottom
R10 "330K" RES-1206 80.391,37.051 r270 bottom
R11 "330K" RES-1206 81.596,16.621 r90 top
R12 "330K" RES-1206 77.648,37.058 r270 bottom
R13 "330K" RES-1206 20.989,13.529 r90 bottom
R14 "330K" RES-1206 81.712,21.031 r0 bottom
R15 "330K" RES-1206 10.379,36.627 r270 bottom
R16 "330K" RES-1206 80.391,41.623 r270 bottom
R17 "330K" RES-1206 78.003,14.732 r0 top
R18 "330K" RES-1206 77.648,41.631 r270 bottom
R19 "1K" RES-1206 17.229,9.084 r180 bottom
R20 "1K" RES-1206 12.454,9.084 r0 bottom
R21 "1K" RES-1206 13.986,38.582 r0 bottom
R22 "1K" RES-1206 18.796,38.582 r180 bottom
R23 "1K" RES-1206 64.871,22.175 r90 top
R24 "1K" RES-1206 64.902,26.959 r270 top
R25 "1K" RES-1206 17.339,44.885 r270 bottom
R26 "1K" RES-1206 60.538,23.658 r0 top
R27 "1K" RES-1206 15.959,5.477 r90 bottom
R28 "47K" RES-1206 54.045,4.318 r90 top
R29 "10K" RES-0603 94.726,27.203 r180 top
R30 "47K" RES-1206 57.717,4.371 r90 top
R31 "47K" RES-1206 61.603,4.4 r270 top
R32 "25K" RES-1206 16.386,21.971 r90 bottom
R33 "25K" RES-1206 60.003,11.871 r0 top
R34 "1K" RES-1206 11.09,45.575 r180 top
R35 "1K" RES-1206 14.563,35.288 r270 top
R36 "1K" RES-1206 86.47,27.211 r270 top
R37 "1K" RES-1206 80.095,27.102 r270 top
R38 "1K" RES-1206 10.048,8.433 r180 top
R39 "1K" RES-1206 13.958,18.819 r90 top
R40 "10K" RES-0603 42.697,40.595 r270 top
R41 "25K" RES-1206 10.197,29.005 r180 top
R42 "25K" RES-1206 12.802,23.925 r180 bottom
R43 "25K" RES-1206 64.806,11.86 r0 top
R44 "25K" RES-1206 5.119,29.005 r180 top
R45 "25K" RES-1206 8.066,23.925 r180 bottom
R46 "25K" RES-1206 69.545,11.86 r0 top
R47 "25K" RES-1206 3.574,25.065 r270 top
R48 "75K" RES-0603 94.719,24.036 r180 top
R49 "75K" RES-0603 94.742,22.454 r180 top
R50 "75K" RES-0603 94.726,25.625 r180 top
TP1 "Test_Point_PCB" Test_Point 69.21,2.821 r0 top
TP2 "Test_Point_PCB" Test_Point 9.703,49.078 r0 top
TP3 "Test_Point_PCB" Test_Point 19.916,34.064 r0 top
TP4 "Test_Point_PCB" Test_Point 26.619,29.405 r0 top
TP5 "Test_Point_PCB" Test_Point 24.302,13.558 r0 top
TP6 "Test_Point_PCB" Test_Point 78.22,20.447 r0 top
TP7 "Test_Point_PCB" Test_Point 71.984,17.094 r0 top
TP8 "Test_Point_PCB" Test_Point 58.858,28.298 r0 top
TP9 "Test_Point_PCB" Test_Point 6.756,39.822 r0 top
TP10 "Test_Point_PCB" Test_Point 18.44,1.346 r90 top
TP11 "Test_Point_PCB" Test_Point 26.604,25.595 r90 top
TP12 "Test_Point_PCB" Test_Point 3.353,8.331 r90 top
TP13 "Test_Point_PCB" Test_Point 11.862,14.667 r90 top
TP14 "Test_Point_PCB" Test_Point 13.503,49.608 r90 top
TP15 "Test_Point_PCB" Test_Point 17.457,35.595 r90 top
TP16 "Test_Point_PCB" Test_Point 88.986,29.632 r90 top
TP17 "Test_Point_PCB" Test_Point 18.466,49.327 r90 top
TP18 "Test_Point_PCB" Test_Point 45.466,19.99 r90 top
TP19 "Test_Point_PCB" Test_Point 27.349,5.162 r90 top
TP20 "Test_Point_PCB" Test_Point 26.441,19.99 r90 top
TP21 "Test_Point_PCB" Test_Point 24.13,34.544 r90 top
TP22 "Test_Point_PCB" Test_Point 23.89,49.682 r90 top
TP23 "Test_Point_PCB" Test_Point 45.796,46.952 r90 top
TP24 "Test_Point_PCB" Test_Point 66.903,36 r90 top
TP25 "Test_Point_PCB" Test_Point 59.673,35.983 r90 top
TP26 "Test_Point_PCB" Test_Point 54.045,11.465 r90 top
TP27 "Test_Point_PCB" Test_Point 13.665,29.108 r90 top
TP28 "Test_Point_PCB" Test_Point 20.045,30.714 r90 top
TP29 "Test_Point_PCB" Test_Point 86.657,23.851 r90 top
TP30 "Test_Point_PCB" Test_Point 77.47,25.552 r90 top
TP31 "Test_Point_PCB" Test_Point 9.119,19.71 r90 top
TP32 "Test_Point_PCB" Test_Point 20.015,22.86 r90 top
VD1 "DIODE" DIODE-0805 8.743,42.497 r270 bottom
VD2 "DIODE" DIODE-0805 8.743,46.132 r270 bottom
VD3 "DIODE" DIODE-0805 23.952,46.256 r90 bottom
VD4 "DIODE" DIODE-0805 24.002,42.646 r90 bottom
VD5 "DIODE" DIODE-0805 63.549,17.181 r0 top
VD6 "DIODE" DIODE-0805 59.826,17.181 r0 top
VD7 "DIODE" DIODE-0805 59.884,31.954 r180 top
VD8 "DIODE" DIODE-0805 63.498,31.954 r180 top
VD9 "DIODE" DIODE-0805 22.294,7.745 r90 bottom
VD10 "DIODE" DIODE-0805 22.295,4.012 r90 bottom
VD11 "DIODE" DIODE-0805 7.391,4.038 r270 bottom
VD12 "DIODE" DIODE-0805 7.341,7.636 r270 bottom
VD13 "DIODE" DIODE-0805 10.547,42.522 r90 bottom
VD14 "DIODE" DIODE-0805 10.547,46.133 r90 bottom
VD15 "DIODE" DIODE-0805 22.143,46.256 r270 bottom
VD16 "DIODE" DIODE-0805 22.198,42.563 r270 bottom
VD17 "DIODE" DIODE-0805 63.498,18.908 r180 top
VD18 "DIODE" DIODE-0805 59.79,18.908 r180 top
VD19 "DIODE" DIODE-0805 59.884,30.216 r0 top
VD20 "DIODE" DIODE-0805 63.507,30.259 r0 top
VD21 "DIODE" DIODE-0805 20.541,7.685 r270 bottom
VD22 "DIODE" DIODE-0805 20.541,3.961 r270 bottom
VD23 "DIODE" DIODE-0805 9.118,4.064 r90 bottom
VD24 "DIODE" DIODE-0805 9.118,7.661 r90 bottom
VD25 "DIODE" DIODE-0805 83.223,30.582 r180 top
VD26 "DIODE" DIODE-0805 13.646,11.574 r90 top
VD27 "DIODE" DIODE-0805 12.741,42.374 r270 top
VD28 "DIODE" DIODE-0805 83.261,28.811 r0 top
VD29 "DIODE" DIODE-0805 11.791,11.488 r270 top
VD30 "DIODE" DIODE-0805 14.494,42.374 r90 top
X1 "BH-10" BH-10 53,44 r0 top locked
X2 "CONN-5-PIN" CONN-PLS-5-2.54_2 88,20 r270 top locked
X3 "CONN-5-PIN" CONN-PLS-5-2.54_2 48.5,20.42 r90 bottom locked
X4 "CONN-5-PIN" CONN-PLS-5-2.54_2 22.5,20.42 r90 bottom locked
X5 "CONN-5-PIN" CONN-PLS-5-2.54_2 74.5,20.42 r90 bottom locked

## Footprints (in the part's own frame and the unit in brackets; to place one, negate y for a bottom-side part, rotate by r counter-clockwise, add the part's x,y. Pads: shape width x height; smd on the part's side, far side on the other; paste and mask are expansions set on the pad)
4-SMD [mm]
  rect 1.6x1 smd: 1(-4.575,1.27) 2(-4.575,-1.27) 3(4.575,-1.27) 4(4.575,1.27)
  silkscreen extent -5.6,-2.4 5.6,2.4, body extent -5,-2.29 5,2.29, height 3.85
BH-10 [mm]
  round 1.5 hole 0.9: 1(0,0) 2(2.54,0) 3(5.08,0) 4(7.62,0) 5(10.16,0) 6(0,-2.54) 7(2.54,-2.54) 8(5.08,-2.54) 9(7.62,-2.54) 10(10.16,-2.54)
  silkscreen extent -1.25,-3.75 11.41,1.25, body extent -5.07,-5.82 15.23,3.28, height 9
CAP-0603 [mm]
  rect 0.85x0.9 smd: 1(-0.775,0) 2(0.775,0)
  silkscreen extent -1.43,-0.67 1.43,0.67, body extent -0.8,-0.4 0.8,0.4, height 0.8
CAP-1206 [mm]
  rect 1.3x1.8 smd: 1(-1.425,0) 2(1.425,0)
  silkscreen extent -2.37,-1.2 2.37,1.2, body extent -1.68,-0.87 1.67,0.87, height 0.95
CAPAE9185X108M [mm] "Aluminum Electrolytic Capacitor, Body 8,50x8,50x10,80mm, IPC Low Density"
  rect 4.45x2.5 smd: 1(-3.4,0) 2(3.4,0)
  silkscreen extent -4.3,-4.3 4.3,4.3, body extent -4.95,-4.15 4.95,4.15, height 10.2
CONN-PLS-5-2.54_2 [mm]
  round 1.5 hole 0.9: 1(0,0) 2(2.54,0) 3(5.08,0) 4(7.62,0) 5(10.16,0)
  silkscreen extent -1.25,-1.25 11.41,1.25, body extent -1.27,-1.27 11.43,1.27, height 19.54
DIODE-0805 [mm]
  rect 0.8x1.25 smd mask+0.015: 1(-1,0) 2(1,0)
  silkscreen extent -1.78,-0.76 1.52,0.76, body extent -1.15,-0.67 1.15,0.67, height 0.76
IRM-01 [mm]
  round 2 hole 1: 1(-14,7.6) 2(-14,-7.6) 3(14,0) 4(14,7.6)
  silkscreen extent -17.08,-11.27 17.03,11.32, body extent -16.85,-11.1 16.85,11.1, height 15.2
OSC-QSMD12.3x4.5x4.2 [mm]
  rect 5.5x1.8 smd: 1(-4.25,0) 2(4.25,0)
  silkscreen extent -7.25,-2.35 7.25,2.35, body extent -6.35,-2.35 6.35,2.35, height 4.2
RES-0603 [mm]
  rect 0.85x0.9 smd: 1(-0.775,0) 2(0.775,0)
  silkscreen extent -1.43,-0.67 1.43,0.67, body extent -0.85,-0.45 0.85,0.45, height 0.55
RES-1206 [mm]
  rect 1x1.6 smd: 1(-1.6,0) 2(1.6,0)
  silkscreen extent -2.29,-1.02 2.29,1.02, body extent -1.6,-0.8 1.6,0.8, height 0.6
SOIC20 [mm]
  rect 0.8x1.8 smd: 1(-5.715,-4.8) 2(-4.445,-4.8) 3(-3.175,-4.8) 4(-1.905,-4.8) 5(-0.635,-4.8) 6(0.635,-4.8) 7(1.905,-4.8) 8(3.175,-4.8) 9(4.445,-4.8) 10(5.715,-4.8) 11(5.715,4.8) 12(4.445,4.8) 13(3.175,4.8) 14(1.905,4.8) 15(0.635,4.8) 16(-0.635,4.8) 17(-1.905,4.8) 18(-3.175,4.8) 19(-4.445,4.8) 20(-5.715,4.8)
  silkscreen extent -7.39,-5.8 6.65,5.8, body extent -6.5,-5.32 6.5,5.32, height 2.66
SOT-223-3 [mm]
  rect 0.95x1.9 smd: 1(-2.3,-3.05) 2(0,-3.05) 3(2.3,-3.05)
  rect 3.25x1.9 smd: 4(0,3.05)
  silkscreen extent -3.3,-4.2 3.3,4.2, body extent -3.25,-3.5 3.25,3.5, height 1.7
Test_Point [mm]
  round 1.5 hole 1 paste+0.102 mask+0.102: 1(0,0)

## Part data
C1 C2 C3 C4 C5 C6 C7 C8 C9 C10 C11 C12 C13 C14 C15 C16 C17 C18 C19 C20 C21 C22 C23 C24 C25 C26 C27 C28 C29 C30 C31 C32 C33 C34 C35 C36 C37 C38 C39 C40: library part CAP-NON-POLAR
C41 C42: library part CAPAE9185X108M, "Конденсатор электролитический SMD", ComponentDescription="Конденсатор электролитический SMD, =Value, , , CAPAE9185X108M", ComponentType="Конденсатор электролитический SMD", Package=CAPAE9185X108M
R1 R2 R3 R4 R5 R6 R7 R8 R9 R10 R11 R12 R13 R14 R15 R16 R17 R18 R19 R20 R21 R22 R23 R24 R25 R26 R27 R28 R29 R30 R31 R32 R33 R34 R35 R36 R37 R38 R39 R40 R41 R42 R43 R44 R45 R46 R47 R48 R49 R50: library part RES-CONST
TP1 TP2 TP3 TP4 TP5 TP6 TP7 TP8 TP9 TP10 TP11 TP12 TP13 TP14 TP15 TP16 TP17 TP18 TP19 TP20 TP21 TP22 TP23 TP24 TP25 TP26 TP27 TP28 TP29 TP30 TP31 TP32: library part TP_PCB?, "Test_Point"

## Via types
v1: diameter 0.8, hole 0.3, Top Layer to Bottom Layer, tented both sides, 50 vias
v2: diameter 0.6, hole 0.2, Top Layer to Bottom Layer, tented both sides, 13 vias

## Nets (pads, with @x,y where several pads share a name; then routed paths per layer and width w, separated by ;. In a path a pad name is that pad's centre, name@x,y a point inside that pad or via, vN(x,y) a via of type N, cw(c..) or ccw(c..) an arc to the next point about the centre after c; other vN are vias at no path point)
3.3V: C36.1 C37.1 C38.1 C40.2 C42.1 DD1.19 DD2.19 DD3.19 DD5.2 R29.1 R40.2 R48.1 R49.1 R50.1 TP23.1 X1.4 | length 114.6
  Top Layer w0.5: DD3.19 v1(42.636,16.945) ; DD2.19 39.841,31.905 41.93,31.905 41.93,31.85 42.091,31.689 42.411,31.689 42.54,31.56 v1(42.621,31.56) ; DD1.19 39.821,46.924 41.87,46.924 C36.1 v1(42.621,46.903) ; v2(42.646,39.17) 42.665,39.189 42.665,39.788 R40.2 ; v1@60.62,46.903 65.591,46.903 66.635,45.859 C40.2 ; C40.2@70.612,45.859 75.378,45.859 76.378,46.859 76.378,47.371 C42.1 76.597,47.371 DD5.2 82.757,47.289 84.568,47.289 85.454,46.404 85.454,38.691 95.501,28.645 R29.1 95.509,27.195 95.509,25.625 95.509,24.036 95.509,22.462 R49.1
  Bottom Layer w0.5: v1@42.621,16.945 v1(42.621,31.56) 42.621,39.074 42.627,39.08 42.627,39.139 v2@42.621,39.145 ; v2(42.646,39.17) 42.634,39.182 42.634,46.89 v1(42.621,46.903) 42.646,46.928 45.771,46.928 TP23.1 45.843,46.906 60.574,46.906 v1(60.62,46.859) X1.4@60.62,44.628
5V: C39.2 C41.1 DD4.3 DD5.3 TP25.1 X1.10 | length 30.8
  Top Layer w0.5: TP25.1 59.681,35.991 61.601,35.991 DD4.3 63.119,37.509 X1.10@63.119,41.46 ; v2@69.31,42.479 69.85,43.019 70.54,43.019 C39.2 ; C39.2@70.663,43.166 72.794,43.166 73.875,44.247 79.339,44.247 80.007,44.915 82.519,44.915 DD5.3
  Bottom Layer w0.5: X1.10@63.178,41.478 69.002,41.478 69.291,41.767 v2(69.291,42.46) ; C41.1@69.446,41.972 70.002,41.416 C41.1
A_IN: R3.2 R34.2 R41.1 TP27.1 X4.4 | length 29.4
  Top Layer w0.8: R34.2 9.49,33.334 v1(14.783,28.042) ; R41.1 11.848,29.057 13.613,29.057 TP27.1
  Bottom Layer w0.5: R3.2 R3.2@16.278,28.092 ; X4.4@22.499,28.041 X4.4
  Bottom Layer w0.8: v1(14.783,28.042) 16.228,28.042 R3.2@16.278,28.092 ; R3.2@16.277,28.041 X4.4@22.499,28.041
A_OUT: R35.2 TP28.1 X4.5 | length 9.4
  Top Layer w0.8: R35.2 14.663,33.588 R35.2@14.978,33.588 ; R35.2@14.884,33.615 17.098,33.615 TP28.1@19.999,30.714 ; TP28.1@19.883,30.714 22.366,30.714 X4.5
B_IN: R1.2 R32.1 R38.2 TP31.1 X4.1 | length 25.5
  Top Layer w0.8: R38.2 8.448,18.97 9.144,19.666 TP31.1@9.149,19.666
  Bottom Layer w0.8: TP31.1@9.149,19.666 9.238,19.666 9.968,20.396 R1.2@14.199,20.396 ; R1.2 R1.2@14.199,20.396 ; R1.2@14.497,20.396 R1.2@14.199,20.396 ; X4.1@22.448,20.472 15.009,20.472 14.982,20.445 14.248,20.445 R1.2@14.199,20.396
B_OUT: R39.2 TP32.1 X4.2 | length 9.8
  Top Layer w0.8: R39.2@14.076,20.519 13.976,20.419 R39.2 17.686,20.419 20.227,22.96 X4.2
C_IN: R5.2 R33.1 R36.2 TP29.1 X5.2 | length 38.3
  Top Layer w1: v2(57.379,11.921) 58.403,11.921 R33.1 ; X5.2 77.828,22.96 81.293,22.96 81.321,22.989 R5.2@81.593,22.989 ; R5.2@81.645,22.989 82.214,22.989 82.238,23.012 85.822,23.012 86.657,23.848 TP29.1 ; R36.2 86.701,25.611 TP29.1@86.701,23.53
  Layer 2 w0.5: v2@57.379,11.951 57.381,11.951 57.429,11.998 57.429,12.001 58.963,13.535 64.826,13.535 69.446,18.156 69.446,19.424 72.982,22.96 X5.2
C_OUT: R37.2 TP30.1 X5.3 | length 5.7
  Top Layer w1: X5.3 74.502,25.502 R37.2 R37.2@80.239,25.502
CLKOUT: DD1.12 X1.6 | length 15.1
  Top Layer w0.5: DD1.12 39.803,38.052 44.854,38.052 v1(44.856,38.049)
  Bottom Layer w0.5: v1(44.856,38.049) 48.235,41.427 X1.6@53.507,41.427
CS_A: DD1.18 X1.7 | length 17.5
  Top Layer w0.5: DD1.18 v2(44.298,45.675)
  Bottom Layer w0.5: v2(44.298,45.675) 46.242,43.731 51.25,43.731 52.251,42.73 54.273,42.73 55.54,41.463 X1.7
CS_B: DD3.18 X1.9 | length 41.1
  Top Layer w0.5: DD3.18 42.752,15.675 43.497,16.421 43.497,29.028 45.542,31.073 45.542,33.223 49.104,36.785 57.578,36.785 60.62,39.827 X1.9
CS_C: DD2.18 X1.8 | length 24.7
  Top Layer w0.5: DD2.18 43.276,30.675 44.298,31.697 44.298,33.79 48.633,38.125 55.982,38.125 58.137,40.281 58.137,41.403 X1.8
CZ_A: DA4.4 R50.2 X2.2 | length 29.9
  Top Layer w0.5: v2(86.919,2.48) 86.919,6.924 86.258,7.584 86.258,15.718 X2.2 90.678,20.138 90.678,24.055 92.248,25.625 R50.2
  Bottom Layer w0.5: DA4.4 v2(86.919,2.48)
CZ_B: DA2.4 R48.2 X2.3 | length 15.7
  Top Layer w0.5: X2.3 91.923,18.843 91.923,22.946 93.012,24.036 R48.2
  Bottom Layer w0.5: DA2.4 85.835,14.48 86.275,14.92 X2.3
CZ_C: DA3.4 R49.2 X2.4 | length 17.8
  Top Layer w0.5: v2(93.892,21.666) 93.911,21.685 93.911,22.398 R49.2
  Bottom Layer w0.5: DA3.4 84.825,8.98 85.188,8.98 86.208,10 86.208,10.588 X2.4 90.249,14.629 90.249,18.023 v2(93.892,21.666)
DC_HV: DD4.2 R28.2 TP26.1 X3.3 | length 23.3
  Top Layer w0.8: DD4.2 54.008,7.998 54.008,5.955 R28.2
  Bottom Layer w1: X3.3 51.03,25.5 54.01,22.52 DD4.2@54.01,8.055
GND: C34.1 C35.1 C36.2 C37.2 C38.2 C39.1 C40.1 C41.2 C42.2 DA1.3 DA2.3 DA3.3 DA4.3 DD1.11 DD1.20 DD2.11 DD2.20 DD3.11 DD3.20 DD4.4 DD5.1 TP24.1 X1.5 | length 100.3
  Top Layer w0.5: DD5.1 85.303,49.671 85.342,49.632 v2(85.369,49.632) ; DA1.3 v2(85.75,3.73)
  Top Layer w1: 47.724,14.34 54.126,20.742 54.126,35.373
  Layer 2 w0.5: v2(85.369,49.632) 86.137,48.864 86.137,39.486 88.902,36.721 88.902,34.034 93.926,29.01 93.926,23.217 90.5,19.791 90.5,6.024 88.206,3.73 v2(85.75,3.73)
  Bottom Layer w0.5: DA4.3 84.875,5.02 85.125,4.77 85.731,4.164 85.731,3.749 v2(85.75,3.73) ; DA4.3@84.575,5.08 84.531,5.124 83.319,5.124 82.855,5.588 82.855,11.27 ; DA3.3 82.855,11.27 ; DA2.3 84.477,16.922 83.318,16.922 82.855,16.459 82.855,11.27
  other v1: 42.36,10.146 46.327,41.865 70.612,48.87
GNDISO_A: C3.1 C4.1 C7.1 C10.1 C11.1 C16.1 C19.1 C24.1 C25.1 C28.1 C29.1 DD1.2 DD1.10 R21.2 R22.2 R25.2 TP17.1 | length 51.5
  Top Layer w0.5: C24.1 26.522,45.703 26.856,45.703 27.881,46.728 28.019,46.728 C28.1 28.215,46.924 30.179,46.924 DD1.2 ; C29.1@27.618,37.267 28.1,36.785 DD1.10
  Top Layer w0.8: C10.1@17.663,45.275 C24.1@26.095,45.275 ; TP17.1 17.413,48.274 C10.1 17.341,45.463 C11.1 17.591,38.521 17.591,37.933 v1(17.78,37.744) 17.903,37.622 C16.1 21.519,37.622 21.769,37.372 22.22,37.372 22.238,37.354 23.033,37.354 23.043,37.344 C19.1@23.343,37.344 ; C19.1@23.377,37.294 25.477,37.294 C29.1 27.593,37.294 27.618,37.269 C29.1@27.618,37.267
  Bottom Layer w0.8: C7.1 C7.1@15.054,43.388 ; R21.2 15.519,38.649 15.519,40.829 C3.1 15.054,41.294 C7.1@15.054,43.388 ; v1(17.78,37.744) 17.734,37.744 17.196,38.282 R22.2 17.196,43.142 R25.2 17.236,43.388 C7.1@15.054,43.388
GNDISO_B: C1.1 C2.1 C9.1 C14.1 C15.1 C18.1 C21.1 C23.1 C27.1 C32.1 C33.1 DD3.2 DD3.10 R19.2 R20.2 R27.2 TP19.1 | length 53.5
  Top Layer w0.5: C18.1 21.165,6.629 23.133,6.629 25.241,6.629 C33.1@27.349,6.629 ; C23.1@25.984,15.103 26.384,15.503 26.781,15.503 27.806,16.528 27.917,16.528 28.267,16.878 28.572,16.878 28.585,16.891 30.146,16.891 DD3.2 ; TP19.1 C33.1@27.349,6.629 ; C33.1 C33.1@27.349,6.629 ; C33.1@27.384,6.756 DD3.10@30.171,6.756
  Top Layer w0.8: C14.1 16.636,8.037 16.886,7.787 16.901,7.787 v1@17.653,7.036 ; C14.1@16.738,7.936 16.738,14.913 16.988,15.163 17.412,15.163 17.457,15.207 C23.1@26.353,15.207 ; v1@17.638,7.036 20.759,7.036 C18.1
  Bottom Layer w0.8: C9.1 13.716,7.077 R27.2 15.729,7.077 15.629,7.177 R19.2 15.629,10.966 15.908,11.245 C1.1 C2.1 13.995,11.265 13.995,9.143 R20.2 13.985,9.015 13.985,7.207 C9.1@13.754,6.977 ; R27.2@16.099,7.036 v1(17.678,7.036)
GNDISO_C: C5.1 C6.1 C8.1 C12.1 C13.1 C17.1 C20.1 C22.1 C26.1 C30.1 C31.1 DD2.2 DD2.10 R23.2 R24.2 R26.2 TP18.1 | length 90.7
  Top Layer w0.5: C22.1@26.035,32.357 26.4,31.992 28.309,31.992 30.153,31.992 DD2.2 v1(33.02,31.945) ; DD2.10 v1(33.934,21.785) ; C13.1 C13.1@80.158,33.495 ; C12.1@86.407,33.495 C12.1
  Top Layer w0.8: C8.1 62.028,25.834 62.028,23.768 R26.2 62.138,23.685 62.238,23.785 v1(63.313,23.785) 63.322,23.775 R23.2 ; R24.2 64.902,23.807 R23.2 ; C13.1@80.158,33.477 73.381,33.477 70.612,30.709 70.612,27.246 69.023,25.657 67.385,25.657 C6.1 67.341,23.53 C5.1 67.171,23.637 65.009,23.637 R23.2 ; C13.1@80.158,33.495 81.741,33.495 C12.1@86.407,33.495
  Layer 2 w0.5: v1(33.934,21.785) 43.71,21.785 45.486,20.01 46.852,18.644 58.117,18.644 63.259,23.785 v1(63.313,23.785)
  Bottom Layer w0.5: v1(33.02,31.945) 33.029,31.936 33.029,27.97 C17.1 ; C17.1@33.182,27.961 33.182,22.258 C26.1 33.26,21.785 v1(33.934,21.785)
MISO: DD1.16 DD2.16 DD3.16 X1.2 | length 53.1
  Top Layer w0.5: v1(37.62,13.106) 37.634,13.121 39.786,13.121 DD3.16 ; v1(37.62,28.169) 37.647,28.169 37.681,28.135 DD2.16 ; v1(37.62,43.135) 44.597,43.135 45.017,42.715 54.374,42.715 X1.2@55.584,43.926
  Bottom Layer w0.5: v1(37.62,13.106) v1(37.62,28.169) v1(37.62,43.135)
MOSI: DD1.15 DD2.15 DD3.15 R40.1 X1.3 | length 55.9
  Top Layer w0.5: v1(38.583,11.887) 38.594,11.876 39.789,11.876 DD3.15 ; v1(38.583,41.885) 38.592,41.875 39.8,41.875 39.81,41.865 42.177,41.865 42.497,41.545 42.547,41.545 R40.1@42.666,41.427 ; v1(38.594,26.822) 38.613,26.842 39.777,26.842 DD2.15 ; R40.1 44.22,41.37 46.126,39.464 55.407,39.464 56.82,40.877 56.82,42.739 X1.3@58.081,44
  Bottom Layer w0.5: v1(38.583,11.887) v1@38.583,26.811 ; v1(38.583,41.885) 38.588,41.879 38.588,26.828 v1(38.594,26.822)
NetC10_2: C10.2 DD1.6 R34.1 TP14.1 VD27.1 VD30.2 | length 31.9
  Top Layer w0.5: TP14.1 13.665,49.608 14.51,48.763 14.51,48.013 v1(14.567,47.955) 14.565,47.953 14.565,45.537 C10.2 ; DD1.6 30.21,41.875 31.639,41.875 v1(31.648,41.885)
  Top Layer w0.8: R34.1@12.71,45.555 R34.1 12.69,43.374 VD27.1 VD30.2 14.563,43.374 C10.2
  Layer 2 w0.5: v1(14.567,47.955) 20.638,41.885 v1(31.648,41.885)
NetC11_2: C11.2 DD1.7 R35.1 TP15.1 VD27.2 VD30.1 | length 27.1
  Top Layer w0.5: R35.1 14.813,36.638 16.143,36.638 16.995,35.786 17.127,35.654 17.127,35.648 17.18,35.595 TP15.1 ; DD1.7 v1(31.547,40.595)
  Top Layer w0.8: VD27.2 VD30.1 14.492,41.373 14.492,39.023 C11.2 R35.1@14.491,36.959
  Layer 2 w0.5: TP15.1 17.51,35.595 22.51,40.595 v1(31.547,40.595)
NetC12_2: C12.2 DD2.6 R36.1 TP16.1 VD25.1 VD28.2 | length 75.5
  Top Layer w0.5: v1(28.55,26.848) 28.558,26.856 30.191,26.856 DD2.6
  Top Layer w0.8: VD25.1 84.266,30.538 VD28.2@84.266,28.854 ; VD25.1@84.223,30.606 84.323,30.706 84.348,30.706 84.35,30.709 86.574,30.709 86.741,30.542 86.657,30.459 86.47,30.459 C12.2 ; R36.1 86.47,29.657 ; C12.2@86.47,30.271 86.47,29.657 ; v1(87.67,29.657) 86.47,29.657 ; v1@87.695,29.632 TP16.1
  Layer 3 w0.5: v1(28.55,26.848) 30.378,26.848 37.186,33.655 83.672,33.655 87.683,29.644 88.973,29.644 TP16.1
NetC13_2: C13.2 DD2.7 R37.1 TP11.1 VD25.2 VD28.1 | length 70
  Top Layer w0.5: TP11.1@26.518,25.629 DD2.7@30.166,25.629 ; VD25.2 82.372,30.73 v1@82.372,32.11
  Top Layer w0.8: R37.1 C13.2 ; C13.2 VD25.2 ; VD25.2@82.223,30.543 82.223,30.356 82.261,30.318 VD28.1
  Layer 3 w0.5: TP11.1 26.663,25.654 30.404,25.654 37.44,32.69 78.63,32.69 79.186,32.134 v1(82.396,32.134)
NetC14_2: C14.2 DD3.6 R38.1 TP12.1 VD26.1 VD29.2 | length 42
  Top Layer w0.5: R38.1@11.582,8.367 R38.1 ; DD3.6 30.211,11.876 31.841,11.876 v1(31.852,11.887)
  Top Layer w0.8: TP12.1 3.487,8.197 4.3,8.197 6.683,5.813 10.589,5.813 v1(11.582,6.807) ; v1@11.582,6.834 R38.1@11.582,8.367 ; VD29.2 11.72,10.416 11.72,8.505 R38.1 11.794,8.287 C14.2 13.716,8.358 13.716,10.503 VD26.1
  Layer 2 w0.5: v1(11.582,6.807) 13.64,8.865 28.829,8.865 v1(31.852,11.887)
NetC15_2: C15.2 DD3.7 R39.1 TP13.1 VD26.2 VD29.1 | length 30.4
  Top Layer w0.5: TP13.1 13.642,14.667 C15.2@13.767,14.541 ; v1(28.778,10.592) 28.78,10.594 30.198,10.594 DD3.7
  Top Layer w0.8: VD29.1 13.335,12.488 13.421,12.574 VD26.2 13.767,12.695 C15.2@13.767,14.291 ; TP13.1@11.862,14.629 C15.2@13.854,14.629 ; C15.2@13.923,14.698 13.923,17.184 R39.1
  Layer 2 w0.5: TP13.1@11.684,14.859 15.951,10.592 v1(28.778,10.592)
NetC16_2: C16.2 C19.2 DD1.8 | length 13.3
  Top Layer w0.5: C16.2 21.669,40.072 21.955,40.072 22.982,39.044 23.202,39.044 C19.2 23.377,41.183 24.079,41.885 26.67,41.885 29.08,39.475 30.05,39.475 DD1.8
NetC17_2: C17.2 C20.2 DD2.8 | length 8.4
  Top Layer w0.5: v1(28.442,24.325) DD2.8
  Bottom Layer w0.5: v1(28.442,24.325) 29.924,25.806 C20.2 31.534,25.981 31.534,26.073 30.588,27.02 30.588,27.561 C17.2
NetC18_2: C18.2 C21.2 DD3.8 | length 12.5
  Top Layer w0.5: C18.2 21.249,9.646 22.369,8.526 22.958,8.526 C21.2 23.133,10.071 24.009,10.947 27.074,10.947 28.618,9.403 30.122,9.403 DD3.8
NetC22_2: C22.2 C30.2 DD2.1 TP21.1 | length 7.2
  Top Layer w0.5: TP21.1@24.277,34.527 24.486,34.735 24.796,34.735 24.923,34.863 26.166,34.863 C22.2 ; C22.2@26.273,34.969 26.45,34.792 27.202,34.792 28.109,33.884 28.109,33.765 28.284,33.59 C30.2 ; C30.2@28.139,33.444 28.48,33.444 28.676,33.249 DD2.1@30.166,33.249
NetC23_2: C23.2 C32.2 DD3.1 TP20.1 | length 5.8
  Top Layer w0.5: C23.2 26.441,18.052 C23.2@26.441,18.253 ; TP20.1 C23.2@26.441,18.253 ; DD3.1 28.13,18.215 28.092,18.253 C23.2@26.441,18.253
NetC24_2: C24.2 C28.2 DD1.1 TP22.1 | length 7.2
  Top Layer w0.5: TP22.1 25.019,48.553 25.722,48.553 C24.2 26.272,48.303 28.044,48.303 C28.2 28.369,48.278 30.137,48.278 DD1.1
NetC25_2: C25.2 C29.2 DD1.9 | length 5.7
  Top Layer w0.5: C25.2 25.877,40.049 26.338,40.049 27.543,38.844 C29.2 27.593,38.844 28.382,38.055 DD1.9
NetC26_2: C26.2 C31.2 DD2.9 | length 7.8
  Top Layer w0.5: v1(28.697,23.012) 28.716,23.032 30.177,23.032 DD2.9
  Bottom Layer w0.5: v1(28.697,23.012) 29.853,24.169 C31.2 31.561,23.994 31.561,23.738 30.134,22.31 C26.2
NetC27_2: C27.2 C33.2 DD3.9 | length 5.6
  Top Layer w0.5: C27.2 25.491,9.62 25.891,9.22 25.891,9.161 26.562,8.49 27.2,8.49 27.495,8.195 30.06,8.195 DD3.9
NetC34_2: C34.2 DD3.13 Q1.1 | length 8.4
  Top Layer w0.4: DD3.13 40,9.125 41.236,9.125 42.335,8.026 C34.2 ; C34.2@42.437,7.874 45.349,7.874 46.152,7.071 Q1.1@46.152,5.783
NetC35_2: C35.2 DD3.14 Q1.2 | length 8.2
  Top Layer w0.4: DD3.14 40,10.795 40.748,10.795 42.073,12.121 42.135,12.121 C35.2 ; C35.2@42.335,12.346 44.994,12.346 45.644,12.996 Q1.2
NetDA1_1: DA1.1 R31.2 | length 15.3
  Top Layer w0.8: R31.2@61.61,2.8 63.701,2.8 66.319,5.418 71.839,5.418 72.691,6.27 DA1.1
NetDA2_1: DA2.1 R45.2 | length 91.4
  Layer 2 w0.5: v2(6.421,21.971) 6.421,19.516 7.948,17.989 7.948,8.156 11.168,4.936 21.599,4.936 24.298,2.237 58.19,2.237 67.688,11.735 72.305,11.735 74.371,13.801 v2(74.371,13.818)
  Bottom Layer w0.5: v2(6.421,21.971) 6.421,21.998 6.466,22.044 R45.2 ; v2(74.371,13.818) 74.39,13.837 74.482,13.837 75.125,14.48 DA2.1
NetDA3_1: DA3.1 R46.2 | length 5.8
  Top Layer w0.5: R46.2 71.145,11.56 71.395,11.31 73.92,8.785 73.92,8.749 v2(73.939,8.73)
  Bottom Layer w0.5: v2(73.939,8.73) DA3.1
NetDA4_1: DA4.1 R47.2 | length 89.9
  Top Layer w0.5: v2(3.574,20.396) R47.2
  Layer 2 w0.5: v2(3.574,20.396) 3.574,19.266 6.045,16.795 6.045,7.137 9.957,3.226 20.943,3.226 23.274,0.896 72.177,0.896 v2@72.98,1.699
  Bottom Layer w0.5: v2(73,1.718) 73,1.726 73.754,2.48 DA4.1
NetDD1_13: DD1.13 DD2.13 DD3.12 | length 35.8
  Top Layer w0.4: DD3.12 39.862,7.993 41.199,7.993 v1(41.237,7.955)
  Top Layer w0.5: DD2.13 41.196,24.325 41.229,24.359 v1(41.257,24.359) ; DD1.13 39.81,39.335 41.24,39.335 v1(41.25,39.345)
  Bottom Layer w0.5: v1(41.237,7.955) 41.247,7.964 41.247,24.349 v1(41.257,24.359) 41.253,24.362 41.253,39.341 v1(41.25,39.345)
NetR1_1: R1.1 R7.2 | length 2.3
  Bottom Layer w0.5: R7.2@15.793,17.45 16.043,17.2 R7.2
  Bottom Layer w0.8: R1.1 14.16,17.158 15.943,17.158 15.992,17.207 R7.2@15.992,17.221
NetR2_1: R2.1 R8.2 | length 3.4
  Bottom Layer w0.8: R2.1 80.43,25.49 82.031,25.49 82.628,26.087 83.272,26.087 R8.2
NetR3_1: R3.1 R9.2 | length 3
  Bottom Layer w0.8: R9.2@13.91,32.803 14.01,32.703 14.567,32.703 15.877,31.393 16.177,31.393 R3.1
NetR4_1: R4.1 R10.2 | length 1.5
  Bottom Layer w0.8: R4.1@80.391,33.901 R10.2
NetR5_1: R5.1 R11.2 | length 1.6
  Top Layer w0.8: R11.2@81.609,18.221 R5.1@81.609,19.789
  Top Layer w1: R11.2 R11.2@81.609,18.221 ; R5.1@81.609,19.789 R5.1
NetR6_1: R6.1 R12.2 | length 1.5
  Bottom Layer w0.8: R6.1 R12.2
NetR7_1: R7.1 R13.2 | length 3.3
  Bottom Layer w0.5: R13.2 R13.2@21.224,15.364
  Bottom Layer w0.8: R7.1 19.343,17.07 19.343,16.77 20.589,15.525 20.589,15.229 20.679,15.138 R13.2@21.031,15.138
NetR8_1: R8.1 R14.2 | length 2.2
  Bottom Layer w0.8: R14.2 83.372,21.091 83.372,22.813 83.471,22.913 R8.1@83.728,22.913
NetR9_1: R9.1 R15.2 | length 2.1
  Bottom Layer w0.8: R15.2 10.71,34.696 R9.1
NetR10_1: R10.1 R16.2 | length 1.4
  Bottom Layer w0.8: R10.1 R16.2
NetR11_1: R11.1 R17.2 | length 2.1
  Top Layer w0.5: R17.2 79.603,14.771 R17.2@79.853,15.021
  Top Layer w0.8: R17.2@79.853,15.021 R11.1
NetR12_1: R12.1 R18.2 | length 1.4
  Bottom Layer w0.8: R12.1 R18.2
NetR28_1: R28.1 R30.1 | length 3.3
  Top Layer w1: R28.1 R30.1@57.328,2.718
NetR30_2: R30.2 R31.1 | length 3.5
  Top Layer w1: R30.2 R31.1@61.189,5.971
NetR32_2: R32.2 R42.1 | length 2.2
  Bottom Layer w1: R42.1 14.402,23.733 15.631,23.733 15.794,23.571 R32.2
NetR33_2: R33.2 R43.1 | length 1.6
  Top Layer w0.5: R43.1@63.195,11.871 R43.1
  Top Layer w1: R33.2 R43.1@63.195,11.871
NetR41_2: R41.2 R44.1 | length 1.9
  Top Layer w0.8: R44.1 R41.2
NetR42_2: R42.2 R45.1 | length 1.5
  Bottom Layer w1: R45.1 R42.2
NetR43_2: R43.2 R46.1 | length 1.5
  Top Layer w1: R43.2 R46.1
NetR44_2: R44.2 R47.1 | length 2.4
  Top Layer w0.8: R44.2 3.546,28.977 3.546,26.692 R47.1
NetVD1_1: VD1.1 VD2.2 | length 1.6
  Bottom Layer w0.8: VD1.1 VD2.2
NetVD3_1: VD3.1 VD4.2 | length 1.6
  Bottom Layer w0.5: VD3.1 VD3.1@23.977,45.231 ; VD4.2@23.977,43.67 VD4.2
  Bottom Layer w0.8: VD4.2@23.977,43.67 VD3.1@23.977,45.231
NetVD5_1: VD5.1 VD6.2 | length 1.7
  Top Layer w0.8: VD6.2 VD5.1
NetVD7_1: VD7.1 VD8.2 | length 1.8
  Top Layer w0.8: VD7.1@60.884,32.062 60.884,31.913 VD8.2@62.498,31.913
NetVD9_1: VD9.1 VD10.2 | length 1.6
  Bottom Layer w0.8: VD10.2 VD9.1@22.295,6.661
NetVD11_1: VD11.1 VD12.2 | length 1.6
  Bottom Layer w0.8: VD12.2 7.366,6.61 7.366,5.064 VD11.1
NetVD13_2: VD13.2 VD14.1 | length 1.6
  Bottom Layer w0.8: VD13.2 VD14.1
NetVD15_2: VD15.2 VD16.1 | length 1.7
  Bottom Layer w0.5: VD15.2 VD15.2@22.171,45.228 ; VD16.1@22.171,43.59 VD16.1
  Bottom Layer w0.8: VD16.1@22.171,43.59 VD15.2@22.171,45.228
NetVD17_2: VD17.2 VD18.1 | length 1.7
  Top Layer w0.8: VD18.1 VD17.2
NetVD19_2: VD19.2 VD20.1 | length 1.6
  Top Layer w0.8: VD19.2 VD20.1@62.464,30.216
NetVD21_2: VD21.2 VD22.1 | length 1.7
  Bottom Layer w0.8: VD22.1 VD21.2
NetVD23_2: VD23.2 VD24.1 | length 1.6
  Bottom Layer w0.8: VD23.2 VD24.1
NEUTRAL: DA1.2 DA2.2 DA3.2 DA4.2 DD4.1 R2.2 R4.2 R6.2 TP1.1 X5.5 | length 69.4
  Top Layer w1: TP1.1@69.193,2.769 74.464,2.769 75.125,3.43 75.125,3.73 DA1.2
  Bottom Layer w0.5: 69.24,5.15 69.37,5.02 DA4.2 76.604,5.02 77.47,5.886 77.47,11.27 ; DA3.2 77.47,11.27 ; DA2.2 76.931,17.02 77.47,16.481 77.47,11.27
  Bottom Layer w1: DD4.1 69.401,8.191 69.401,8.898 69.418,8.915 69.418,26.975 73.023,30.58 X5.5 R6.2@77.648,30.58 ; TP1.1@69.24,2.58 69.24,5.15 DD4.1@69.24,7.97 ; R6.2 80.048,30.709 80.091,30.752 R4.2@80.518,30.752 ; R2.2 R4.2@80.33,30.597
PS: DA1.4 R29.2 X2.1 | length 26
  Top Layer w0.5: DA1.4@84.875,6.27 85.125,6.52 85.125,17.125 X2.1 89.484,21.484 89.484,24.905 91.783,27.203 R29.2
SCLK: DD1.17 DD2.17 DD3.17 X1.1 | length 53
  Top Layer w0.5: v1(36.627,14.275) 36.646,14.294 39.689,14.294 DD3.17 ; v1(36.646,29.337) 36.673,29.337 36.735,29.399 39.794,29.399 DD2.17 ; v1(36.673,44.378) 36.687,44.391 39.8,44.391 47.769,44.391 48.193,43.967 X1.1@52.967,43.967
  Bottom Layer w0.5: v1(36.627,14.275) v1@36.627,29.318 ; v1(36.646,29.337) 36.659,29.351 36.659,44.364 v1(36.673,44.378)
V1P_A: C4.2 DD1.4 R16.1 R22.1 TP3.1 VD4.1 VD16.2 | length 79
  Top Layer w0.5: v1(26.746,42.951) 26.746,42.977 28.174,44.405 DD1.4
  Layer 2 w0.5: v1(26.746,42.951) 26.746,43.028 28.067,44.348 32.995,44.348 36.748,40.595 47.797,40.595 48.895,39.497 78.842,39.497 79.934,40.589 v1(81.636,42.291)
  Bottom Layer w0.5: VD4.1@23.694,41.595 23.745,41.646 25.44,41.646 v1(26.746,42.951) ; R16.1 80.691,43.223 81.623,42.291 v1(81.636,42.291)
  Bottom Layer w0.8: TP3.1 19.916,36.374 20.396,36.854 R22.1 ; C4.2 20.354,40.969 R22.1@20.354,38.582 ; C4.2@20.296,41.272 20.546,41.522 21.933,41.522 21.973,41.563 VD16.2@22.158,41.563 ; VD16.2 23.694,41.563 23.777,41.646 VD4.1
V1P_B: C2.2 DD3.4 R14.1 R20.1 TP6.1 VD12.1 VD24.2 | length 107.5
  Top Layer w0.5: v1(28.869,14.402) v1(28.869,14.402) 30.198,14.404 DD3.4
  Layer 3 w0.5: v1(28.869,14.402) 27.813,14.402 25.197,11.786 10.871,11.786 v1(10.109,12.548) 10.109,15.758 11.699,17.348 38.049,17.348 40.916,14.481 41.063,14.335 72.323,14.335 78.334,20.345 TP6.1@78.334,20.536
  Bottom Layer w0.5: v1(10.109,12.548) 10.113,12.548 10.916,11.745 10.916,11.557 C2.2@10.854,11.495
  Bottom Layer w0.8: VD12.1 10.604,8.636 10.854,8.886 R20.1 C2.2@10.854,11.495
  Bottom Layer w1: TP6.1 79.528,20.447 79.812,20.731 80.112,20.731 R14.1
V1P_C: C6.2 DD2.4 R18.1 R24.1 TP4.1 VD8.1 VD20.2 | length 73.9
  Top Layer w0.5: TP4.1@26.562,29.439 26.604,29.396 26.613,29.405 DD2.4
  Top Layer w0.8: VD8.1 64.498,30.493 64.507,30.484 VD20.2 ; v1(65.38,30.226) 64.507,30.226 VD20.2 ; C6.2 67.293,28.511 64.95,28.511 R24.1 64.607,28.559 64.507,28.659 VD20.2
  Layer 2 w0.5: TP4.1@26.653,29.439 31.58,34.366 57.277,34.366 61.417,30.226 v1(65.38,30.226)
  Bottom Layer w0.5: v1(65.38,30.226) 65.407,30.199 68.629,30.199 74.981,36.551 74.981,41.554 76.472,43.046 77.463,43.046 R18.1
V2P_A: C3.2 DD1.3 R15.1 R21.1 TP9.1 VD1.2 VD13.1 | length 31.7
  Top Layer w0.5: v1(28.653,45.64) 28.67,45.658 30.183,45.658 DD1.3
  Layer 3 w0.5: v1(12.423,39.688) 18.375,45.64 v1(28.653,45.64)
  Bottom Layer w0.5: TP9.1 8.282,41.347 8.593,41.347 VD1.2
  Bottom Layer w0.8: VD1.2 10.297,41.497 10.322,41.522 VD13.1 12.209,41.522 12.459,41.272 C3.2 12.423,41.002 v1(12.423,39.688) 12.423,38.619 R21.1 12.386,38.427 12.286,38.327 10.479,38.327 R15.1
V2P_B: C1.2 DD3.3 R13.1 R19.1 TP5.1 VD9.2 VD21.1 | length 19.3
  Top Layer w0.5: v1(28.869,15.563) 28.888,15.582 30.107,15.582 DD3.3
  Bottom Layer w0.5: R13.1@21.039,11.929 20.989,11.98 22.724,11.98 26.307,15.563 v1(28.869,15.563)
  Bottom Layer w0.8: R13.1 19.158,11.929 18.758,11.529 C1.2 18.794,11.459 18.794,9.12 R19.1 18.829,8.995 19.079,8.745 20.541,8.745 VD9.2
V2P_C: C5.2 DD2.3 R17.1 R23.1 TP7.1 VD5.2 VD17.1 | length 64.6
  Top Layer w0.8: DD2.3 v1(31.648,30.675) ; 64.432,18.136 64.549,18.136 ; VD5.2 64.549,18.136 ; C5.2 67.273,20.612 64.907,20.612 R23.1 64.799,20.575 64.549,20.325 64.549,18.136 ; TP7.1@71.984,17.017 73.87,15.132 76.303,15.132 76.403,15.032 R17.1 ; TP7.1 70.942,18.136 64.549,18.136
  Layer 2 w0.5: v1(31.648,30.675) 31.648,32.385 32.563,33.299 56.421,33.299 66.056,23.665 v1(66.056,20.559)
VM_A: C7.2 DD1.5 R25.1 TP2.1 VD2.1 VD3.2 VD14.2 VD15.1 | length 26
  Top Layer w0.5: v1(28.626,43.091) 28.653,43.091 28.697,43.135 DD1.5
  Bottom Layer w0.5: TP2.1 9.703,47.301 9.872,47.132 ; VD3.2@23.89,47.205 23.989,47.106 24.611,47.106 v1(28.626,43.091)
  Bottom Layer w0.98: VD2.1 9.872,47.132 VD14.2 12.329,47.133 13.12,46.341 C7.2 15.023,46.413 17.267,46.413 R25.1 17.411,46.413 18.829,46.413 19.671,47.256 VD15.1 VD3.2
VM_B: C9.2 DD3.5 R27.1 TP10.1 VD10.1 VD11.2 VD22.2 VD23.1 | length 33.5
  Top Layer w0.5: v1(28.869,13.132) v1(28.869,13.132) 30.198,13.134 DD3.5
  Bottom Layer w0.5: TP10.1 18.44,2.961 ; VD10.1@21.793,2.986 VD10.1@22.295,2.986 ; VD10.1 22.32,2.986 24.26,2.986 25.349,4.075 25.349,10.846 27.635,13.132 v1(28.869,13.132)
  Bottom Layer w0.8: VD11.2 12.277,3.038 13.266,4.027 C9.2 13.665,3.877 R27.1 16.259,3.877 17.176,2.961 18.44,2.961 VD22.2 20.566,2.986 VD10.1@21.793,2.986
VM_C: C8.2 DD2.5 R26.1 TP8.1 VD6.1 VD7.2 VD18.2 VD19.1 | length 52.7
  Top Layer w0.5: v1(28.55,28.135) DD2.5
  Top Layer w0.8: VD6.1@58.808,17.199 VD18.2@58.808,18.89 ; VD6.1 58.826,18.89 58.826,23.658 C8.2@58.826,25.944 ; VD7.2@58.858,32.062 58.858,30.26 58.858,28.462 58.858,26.154 C8.2 ; C8.2@58.872,26.194 C8.2@59.122,25.944
  Layer 2 w0.5: v1(28.55,28.135) 32.301,28.135 34.595,30.429 44.45,30.429 46.228,32.207 54.976,32.207 TP8.1@59.17,28.013
pads on no net: DD1.14 DD2.12 DD2.14 DD5.4 X2.5 X3.1 X3.2 X3.4 X3.5 X4.3 X5.1 X5.4

## Polygon pours and split planes (outlines as drawn)
GND on Bottom Layer "NONET_L-01_P-001" (solid, pour order 0): 35.61,51 35.61,13.409 35.578,13.377 35.566,-0.01 49.003,-0.001 49.003,12.135 43.917,17.221 43.917,29.007 48.976,34.067 69.643,34.067 70.942,35.366 70.942,51
GND on Top Layer "NONET_L-01_P-001" (solid, pour order 1): 35.61,51 35.61,6.145 35.605,-0.01 49.003,-0.001 49.003,15.993 44.577,20.419 44.577,28.702 50.267,34.392 70.866,34.392 70.866,37.998 80.721,37.998 80.721,44.071 84.353,44.071 84.353,51

## Keep-outs
Keep-Out Layer:
  circle w0.254: c94,48 r1.5
  circle w0.254: c94,3 r1.5
  circle w0.254: c3,3 r1.5
  circle w0.254: c3,48 r1.5
  circle w0.254: c3,35.5 r1.5
  circle w0.254: c3,15.5 r1.5
  circle w0.254: c94,15.5 r1.5
  circle w0.254: c94,35.5 r1.5
  lines w0.254: 2.5,0 cw(c2.5,2.5) 0,2.5 0,48.5 cw(c2.5,48.5) 2.5,51 94.5,51 cw(c94.5,48.5) 97,48.5 97,2.504 cw(c94.5,2.504) 94.5,0.004 ; 2.515,0 94.5,0

## Other copper
Top Layer:
  pour cut-out: 43.957,21.59 43.957,18.136 46.863,18.136 46.863,21.59
  text "1" at 88.249,40.914 h1.52
Layer 2:
  text "2" at 90.249,40.914 h1.52
Layer 3:
  text "3" at 92.249,40.914 h1.52
Bottom Layer:
  text "4" at 94.249,40.914 h1.52

## Silkscreen, mask and mechanical layers (free items; w line width, h text height)
Top Overlay:
  circle w1: c94,48 r2.2
  circle w1: c94,35.5 r2.2
  circle w1: c94,15.5 r2.2
  circle w1: c94,3 r2.2
  circle w1: c3,48 r2.2
  circle w1: c3,35.5 r2.2
  circle w1: c3,15.5 r2.2
  circle w1: c3,3 r2.2
  lines w0.2: 1.47,25.5 9.627,25.478 ; 44,25.5 47.32,25.5 ; 48.475,31.93 48.475,41.369 ; 48.5,1.829 48.5,18.847 ; 49.772,25.511 53.093,25.511
  text "CLK_MISO_MOSI_3.3V_GND" at 49.504,49.152 h0.8
  text "CLKOUT_CSA_CSC_CSB_5V" at 49.654,37.172 h0.8
  text "PS" at 84.785,19.678 h0.8
  text "CZ_A" at 83.337,17.134 h0.8
  text "CZ_B" at 83.312,14.558 h0.8
  text "CZ_C" at 83.312,12.046 h0.8
Bottom Overlay:
  circle w1: c94,48 r2.2
  circle w1: c94,35.5 r2.2
  circle w1: c94,15.5 r2.2
  circle w1: c94,3 r2.2
  circle w1: c3,3 r2.2
  circle w1: c3,15.5 r2.2
  circle w1: c3,35.5 r2.2
  circle w1: c3,48 r2.2
Top Solder:
  rectangle: 87.639,40.37 95.844,42.884
Bottom Solder:
  rectangle: 87.639,40.37 95.844,42.884